# Allegro board parasdr_layout.brd
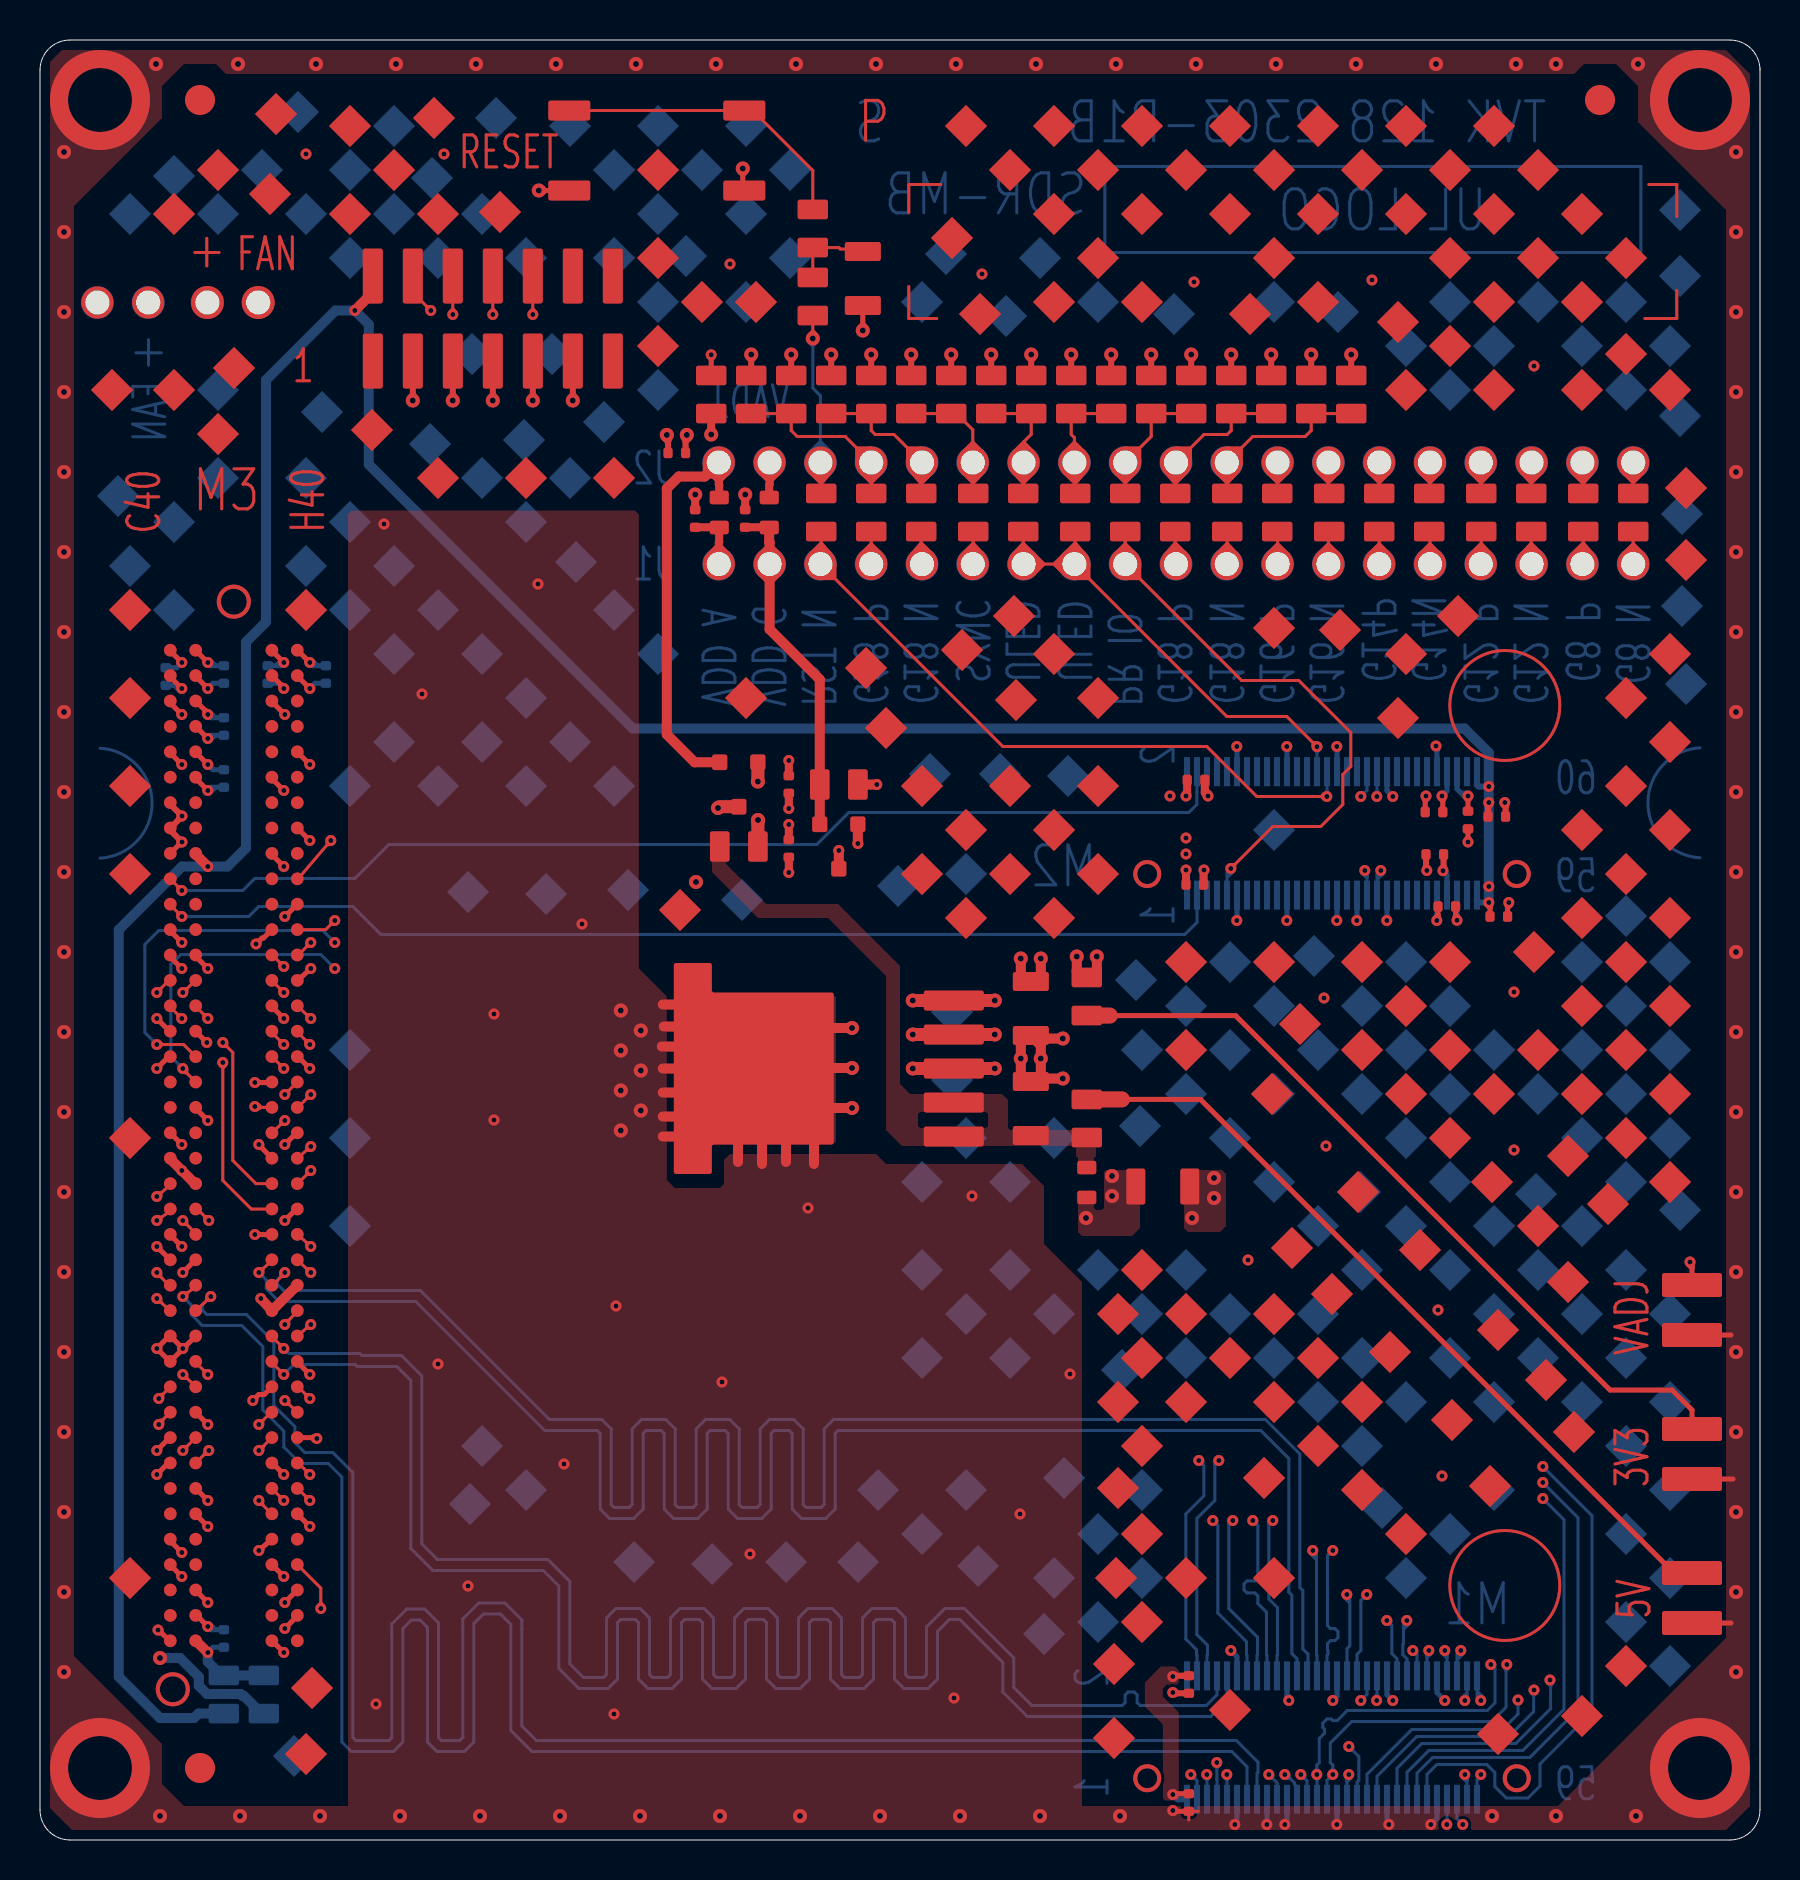
[diagram p0: board, top side]
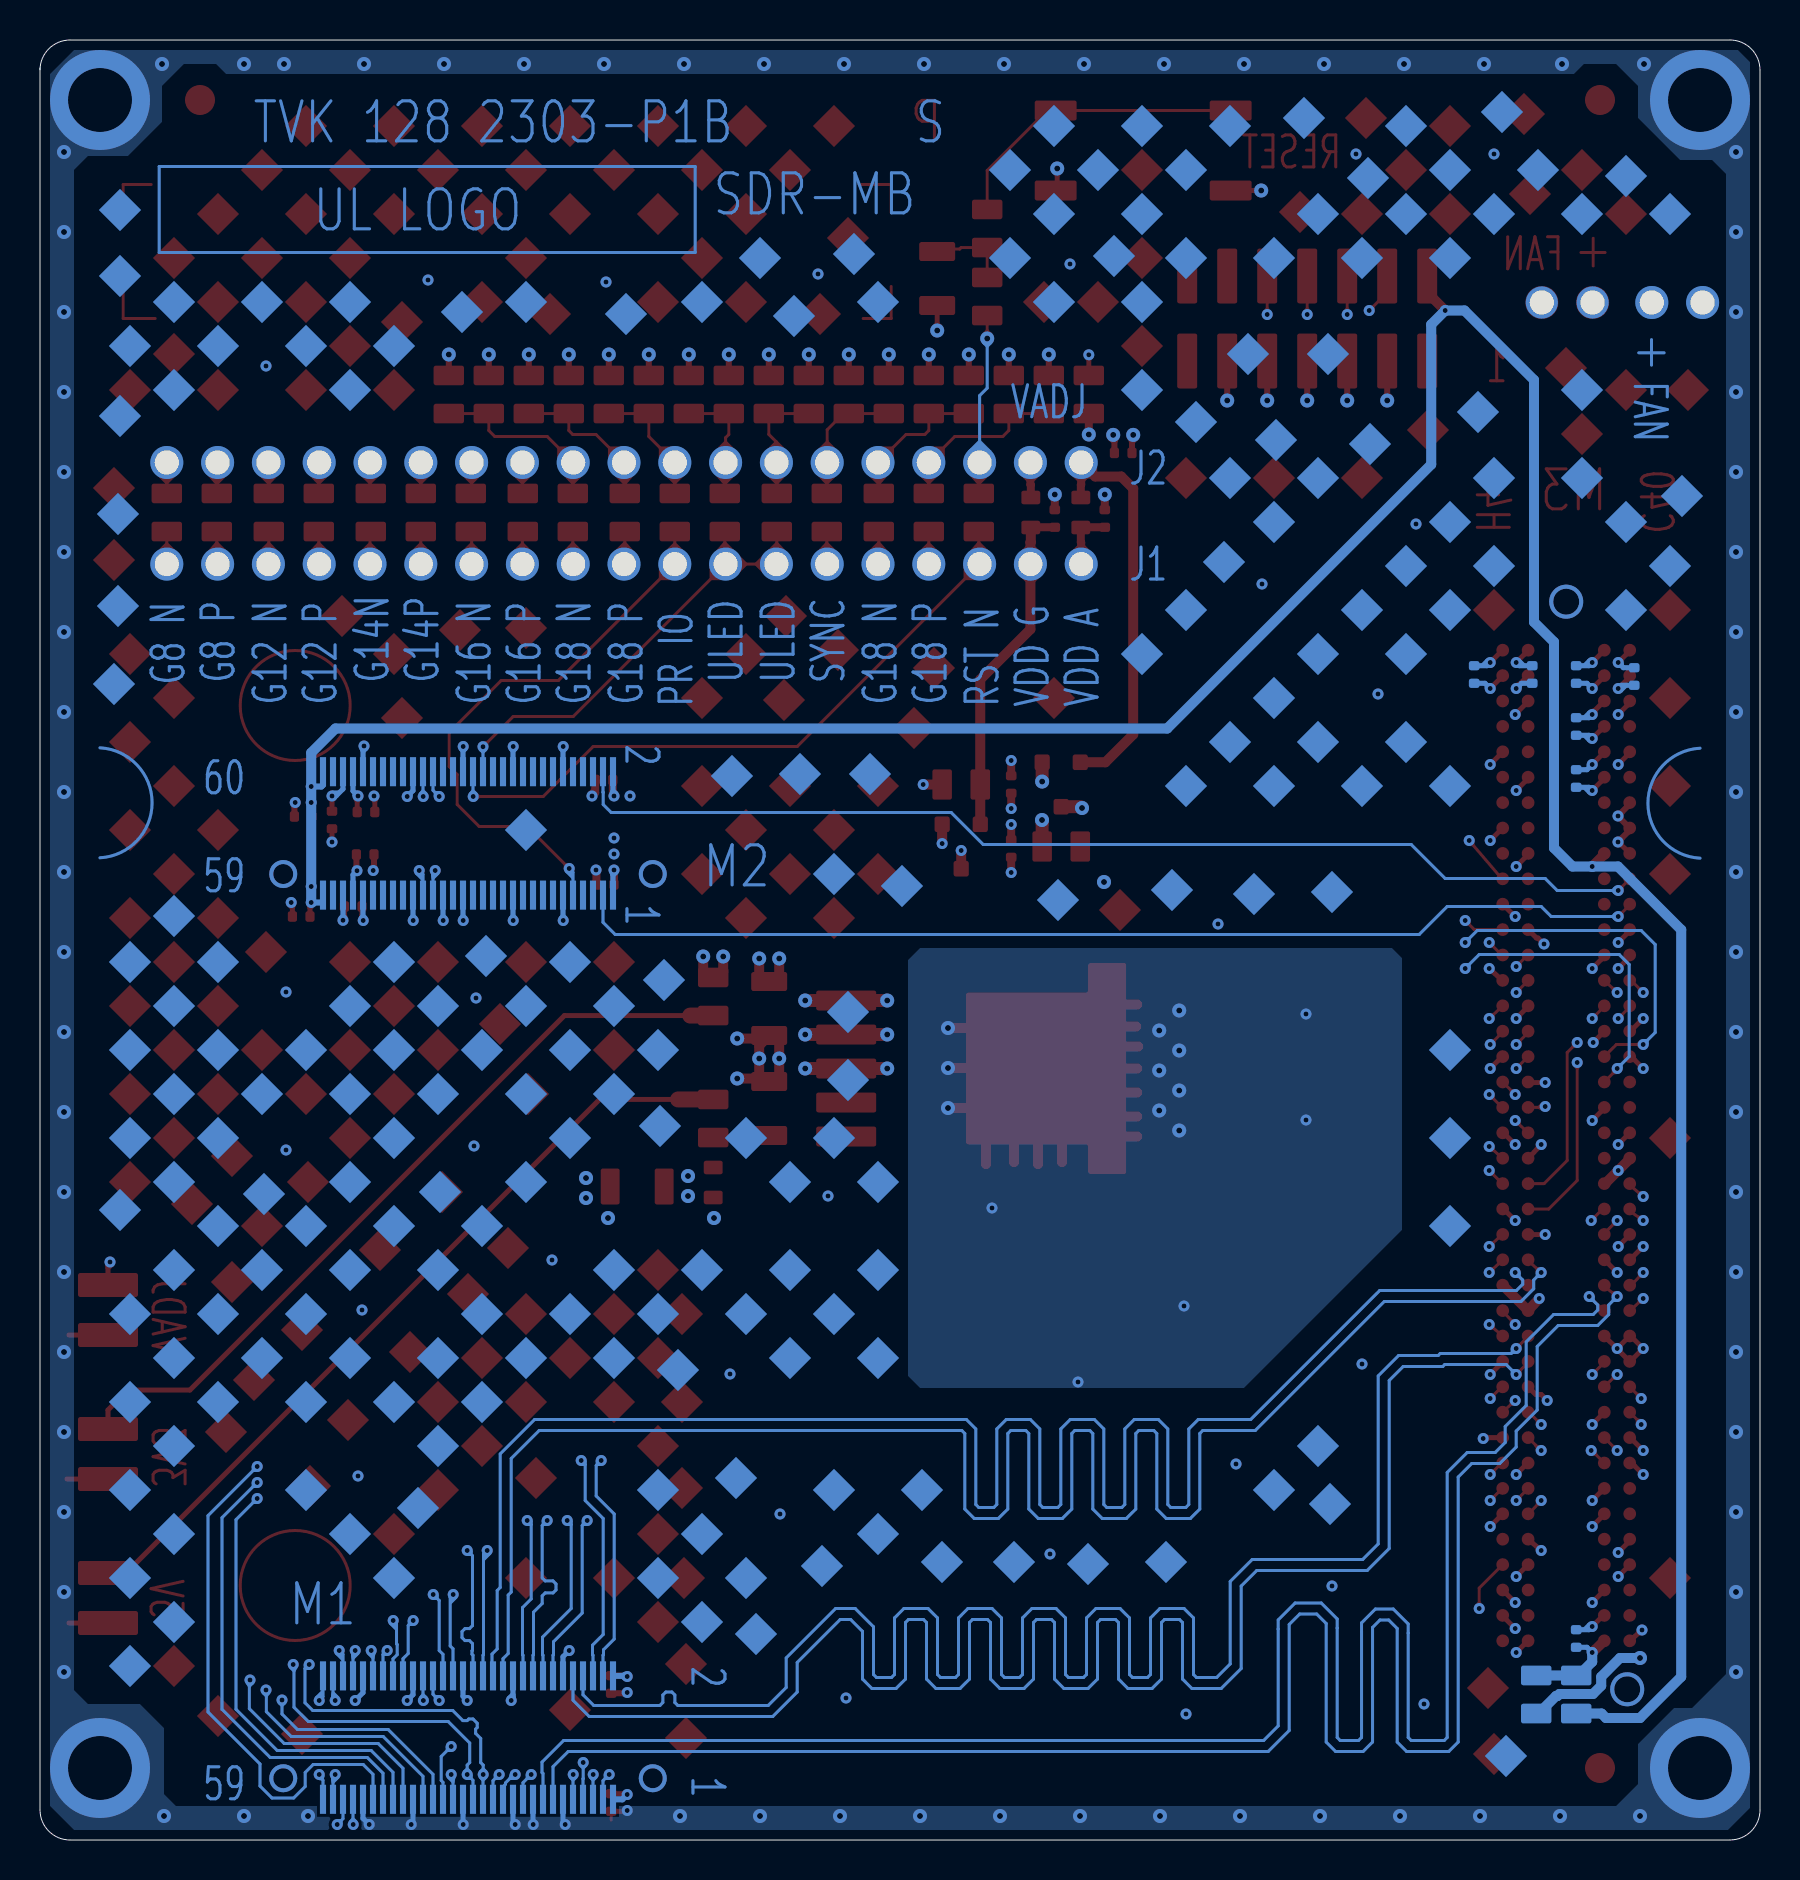
[diagram p1: board, bottom side, seen from below]

Outline 86 x 90 mm; copper layers: TOP, L2-GND, L3-X, L4-Y, L5-GND, BOTTOM. Coordinates in mm from the lower left corner of the outline.

## Design rules (mm)
constraint set DEFAULT: min track width 0.15, pair gap 0.15
net group RX_MG: nets RX_D0_N RX_D0_P RX_D1_N RX_D1_P RX_D2_N RX_D2_P RX_D3_N RX_D3_P RX_D4_N RX_D4_P RX_D5_N RX_D5_P RX_FRAME_N RX_FRAME_P

## Placement (name value [footprint] x y rotation side)
A1  -  [1057-TVJ828V]  8 3.6 0 top
C1  100n  [501-BYZ20902-48_TOP]  57.44 1.88 270 top
C2  10u  [546-BYZ20902-264_TOP]  56.14 32.67 0 top
C3  10u  [546-BYZ20902-264_TOP]  49.54 36.58 90 top
C4  100n  [501-BYZ20902-48_TOP]  57.44 7.78 270 top
C5  10u  [546-BYZ20902-264_TOP]  49.54 41.58 270 top
C6  100n  [501-BYZ20902-48_TOP]  69.74 49.27 180 top
C7  100n  [501-BYZ20902-48_TOP]  70.34 46.68 180 top
C8  100n  [501-BYZ20902-48_TOP]  57.74 47.77 0 top
C9  100n  [501-BYZ20902-48_TOP]  72.94 46.18 0 top
C10  100n  [501-BYZ20902-48_TOP]  72.84 51.18 0 top
C11  100n  [501-BYZ20902-48_TOP]  35.26 66.08 90 top
C12  100n  [501-BYZ20902-48_TOP]  71.4 51 270 top
C13  100n  [501-BYZ20902-48_TOP]  57.8 53 0 top
C14  100n  [501-BYZ20902-48_TOP]  32.76 66.08 90 top
C15  100n  [501-BYZ20902-48_TOP]  69.7 51.4 180 top
C16  100n  [501-BYZ20902-48_TOP]  31.84 69.35 180 top
C17  10u  [546-BYZ20902-264_TOP]  41.14 78.07 270 top
C18  100n  [501-BYZ20902-48_TOP]  14.29 58.27 270 bottom
C19  100n  [501-BYZ20902-48_TOP]  11.39 58.27 90 bottom
C20  100n  [501-BYZ20902-48_TOP]  9.19 53.08 270 bottom
C21  100n  [501-BYZ20902-48_TOP]  9.19 55.68 270 bottom
C22  100n  [501-BYZ20902-48_TOP]  9.19 58.27 270 bottom
C23  100n  [501-BYZ20902-48_TOP]  6.29 58.18 90 bottom
C24  100n  [501-BYZ20902-48_TOP]  9.19 10.07 90 bottom
C25  100n  [501-BYZ20902-48_TOP]  37.44 52.77 270 top
C26  100n  [501-BYZ20902-48_TOP]  37.44 49.58 270 top
E97  -  [501-BYZ21994-999]  8 3.6 0 top
E98  -  [501-BYZ21994-999]  8 87 0 top
E99  -  [501-BYZ21994-999]  78 87 0 top
ET1  -  [028-BYZ20801-1_TOP]  80.34 20.58 180 bottom
ET2  -  [026-BYZ20801-1_TOP]  43.64 76.27 0 top
F1  -  [501-BYZ20901-698_TOP#2]  4.14 76.88 180 bottom
F2  -  [501-BYZ20901-698_TOP]  9.64 76.88 0 top
J1_1  -  [001-BYZ21990-138_TOP]  79.66 63.8 180 bottom
J1_2  -  [001-BYZ21990-138_TOP]  77.12 63.8 180 bottom
J1_3  -  [001-BYZ21990-138_TOP]  74.58 63.8 180 bottom
J1_4  -  [001-BYZ21990-138_TOP]  72.04 63.8 180 bottom
J1_5  -  [001-BYZ21990-138_TOP]  69.5 63.8 180 bottom
J1_6  -  [001-BYZ21990-138_TOP]  66.96 63.8 180 bottom
J1_7  -  [001-BYZ21990-138_TOP]  64.42 63.8 180 bottom
J1_8  -  [001-BYZ21990-138_TOP]  61.88 63.8 180 bottom
J1_9  -  [001-BYZ21990-138_TOP]  59.34 63.8 180 bottom
J1_10  -  [001-BYZ21990-138_TOP]  56.8 63.8 180 bottom
J1_11  -  [001-BYZ21990-138_TOP]  54.26 63.8 180 bottom
J1_12  -  [001-BYZ21990-138_TOP]  51.72 63.8 180 bottom
J1_13  -  [001-BYZ21990-138_TOP]  49.18 63.8 180 bottom
J1_14  -  [001-BYZ21990-138_TOP]  46.64 63.8 180 bottom
J1_15  -  [001-BYZ21990-138_TOP]  44.1 63.8 180 bottom
J1_16  -  [001-BYZ21990-138_TOP]  41.56 63.8 180 bottom
J1_17  -  [001-BYZ21990-138_TOP]  39.02 63.8 180 bottom
J1_18  -  [001-BYZ21990-138_TOP]  36.48 63.8 180 bottom
J1_19  -  [001-BYZ21990-138_TOP]  33.94 63.8 180 bottom
J2_1  -  [001-BYZ21990-138_TOP]  79.66 68.88 180 bottom
J2_2  -  [001-BYZ21990-138_TOP]  77.12 68.88 180 bottom
J2_3  -  [001-BYZ21990-138_TOP]  74.58 68.88 180 bottom
J2_4  -  [001-BYZ21990-138_TOP]  72.04 68.88 180 bottom
J2_5  -  [001-BYZ21990-138_TOP]  69.5 68.88 180 bottom
J2_6  -  [001-BYZ21990-138_TOP]  66.96 68.88 180 bottom
J2_7  -  [001-BYZ21990-138_TOP]  64.42 68.88 180 bottom
J2_8  -  [001-BYZ21990-138_TOP]  61.88 68.88 180 bottom
J2_9  -  [001-BYZ21990-138_TOP]  59.34 68.88 180 bottom
J2_10  -  [001-BYZ21990-138_TOP]  56.8 68.88 180 bottom
J2_11  -  [001-BYZ21990-138_TOP]  54.26 68.88 180 bottom
J2_12  -  [001-BYZ21990-138_TOP]  51.72 68.88 180 bottom
J2_13  -  [001-BYZ21990-138_TOP]  49.18 68.88 180 bottom
J2_14  -  [001-BYZ21990-138_TOP]  46.64 68.88 180 bottom
J2_15  -  [001-BYZ21990-138_TOP]  44.1 68.88 180 bottom
J2_16  -  [001-BYZ21990-138_TOP]  41.56 68.88 180 bottom
J2_17  -  [001-BYZ21990-138_TOP]  39.02 68.88 180 bottom
J2_18  -  [001-BYZ21990-138_TOP]  36.48 68.88 180 bottom
J2_19  -  [001-BYZ21990-138_TOP]  33.94 68.88 180 bottom
L1  120  [510-BYZ20902-264_TOP]  52.34 32.88 90 top
L2  120  [510-BYZ20902-264_TOP]  36.46 66.38 90 top
L3  120  [510-BYZ20902-264_TOP]  33.96 66.38 90 top
M1  -  [503-BYZ11987-1]  57.35 2.03 0 bottom
M1_2  -  [503-BYZ11987-1]  57.35 8.21 0 bottom
M1_3  -  [503-BYZ11987-1]  57.85 2.03 0 bottom
M1_4  -  [503-BYZ11987-1]  57.85 8.21 0 bottom
M1_5  -  [503-BYZ11987-1]  58.35 2.03 0 bottom
M1_6  -  [503-BYZ11987-1]  58.35 8.21 0 bottom
M1_7  -  [503-BYZ11987-1]  58.85 2.03 0 bottom
M1_8  -  [503-BYZ11987-1]  58.85 8.21 0 bottom
M1_9  -  [503-BYZ11987-1]  59.35 2.03 0 bottom
M1_10  -  [503-BYZ11987-1]  59.35 8.21 0 bottom
M1_11  -  [503-BYZ11987-1]  59.85 2.03 0 bottom
M1_12  -  [503-BYZ11987-1]  59.85 8.21 0 bottom
M1_13  -  [503-BYZ11987-1]  60.35 2.03 0 bottom
M1_14  -  [503-BYZ11987-1]  60.35 8.21 0 bottom
M1_15  -  [503-BYZ11987-1]  60.85 2.03 0 bottom
M1_16  -  [503-BYZ11987-1]  60.85 8.21 0 bottom
M1_17  -  [503-BYZ11987-1]  61.35 2.03 0 bottom
M1_18  -  [503-BYZ11987-1]  61.35 8.21 0 bottom
M1_19  -  [503-BYZ11987-1]  61.85 2.03 0 bottom
M1_20  -  [503-BYZ11987-1]  61.85 8.21 0 bottom
M1_21  -  [503-BYZ11987-1]  62.35 2.03 0 bottom
M1_22  -  [503-BYZ11987-1]  62.35 8.21 0 bottom
M1_23  -  [503-BYZ11987-1]  62.85 2.03 0 bottom
M1_24  -  [503-BYZ11987-1]  62.85 8.21 0 bottom
M1_25  -  [503-BYZ11987-1]  63.35 2.03 0 bottom
M1_26  -  [503-BYZ11987-1]  63.35 8.21 0 bottom
M1_27  -  [503-BYZ11987-1]  63.85 2.03 0 bottom
M1_28  -  [503-BYZ11987-1]  63.85 8.21 0 bottom
M1_29  -  [503-BYZ11987-1]  64.35 2.03 0 bottom
M1_30  -  [503-BYZ11987-1]  64.35 8.21 0 bottom
M1_31  -  [503-BYZ11987-1]  64.85 2.03 0 bottom
M1_32  -  [503-BYZ11987-1]  64.85 8.21 0 bottom
M1_33  -  [503-BYZ11987-1]  65.35 2.03 0 bottom
M1_34  -  [503-BYZ11987-1]  65.35 8.21 0 bottom
M1_35  -  [503-BYZ11987-1]  65.85 2.03 0 bottom
M1_36  -  [503-BYZ11987-1]  65.85 8.21 0 bottom
M1_37  -  [503-BYZ11987-1]  66.35 2.03 0 bottom
M1_38  -  [503-BYZ11987-1]  66.35 8.21 0 bottom
M1_39  -  [503-BYZ11987-1]  66.85 2.03 0 bottom
M1_40  -  [503-BYZ11987-1]  66.85 8.21 0 bottom
M1_41  -  [503-BYZ11987-1]  67.35 2.03 0 bottom
M1_42  -  [503-BYZ11987-1]  67.35 8.21 0 bottom
M1_43  -  [503-BYZ11987-1]  67.85 2.03 0 bottom
M1_44  -  [503-BYZ11987-1]  67.85 8.21 0 bottom
M1_45  -  [503-BYZ11987-1]  68.35 2.03 0 bottom
M1_46  -  [503-BYZ11987-1]  68.35 8.21 0 bottom
M1_47  -  [503-BYZ11987-1]  68.85 2.03 0 bottom
M1_48  -  [503-BYZ11987-1]  68.85 8.21 0 bottom
M1_49  -  [503-BYZ11987-1]  69.35 2.03 0 bottom
M1_50  -  [503-BYZ11987-1]  69.35 8.21 0 bottom
M1_51  -  [503-BYZ11987-1]  69.85 2.03 0 bottom
M1_52  -  [503-BYZ11987-1]  69.85 8.21 0 bottom
M1_53  -  [503-BYZ11987-1]  70.35 2.03 0 bottom
M1_54  -  [503-BYZ11987-1]  70.35 8.21 0 bottom
M1_55  -  [503-BYZ11987-1]  70.85 2.03 0 bottom
M1_56  -  [503-BYZ11987-1]  70.85 8.21 0 bottom
M1_57  -  [503-BYZ11987-1]  71.35 2.03 0 bottom
M1_58  -  [503-BYZ11987-1]  71.35 8.21 0 bottom
M1_59  -  [503-BYZ11987-1]  71.85 2.03 0 bottom
M1_60  -  [503-BYZ11987-1]  71.85 8.21 0 bottom
M2  -  [503-BYZ11987-1]  57.35 47.24 0 bottom
M2_2  -  [503-BYZ11987-1]  57.35 53.42 0 bottom
M2_3  -  [503-BYZ11987-1]  57.85 47.24 0 bottom
M2_4  -  [503-BYZ11987-1]  57.85 53.42 0 bottom
M2_5  -  [503-BYZ11987-1]  58.35 47.24 0 bottom
M2_6  -  [503-BYZ11987-1]  58.35 53.42 0 bottom
M2_7  -  [503-BYZ11987-1]  58.85 47.24 0 bottom
M2_8  -  [503-BYZ11987-1]  58.85 53.42 0 bottom
M2_9  -  [503-BYZ11987-1]  59.35 47.24 0 bottom
M2_10  -  [503-BYZ11987-1]  59.35 53.42 0 bottom
M2_11  -  [503-BYZ11987-1]  59.85 47.24 0 bottom
M2_12  -  [503-BYZ11987-1]  59.85 53.42 0 bottom
M2_13  -  [503-BYZ11987-1]  60.35 47.24 0 bottom
M2_14  -  [503-BYZ11987-1]  60.35 53.42 0 bottom
M2_15  -  [503-BYZ11987-1]  60.85 47.24 0 bottom
M2_16  -  [503-BYZ11987-1]  60.85 53.42 0 bottom
M2_17  -  [503-BYZ11987-1]  61.35 47.24 0 bottom
M2_18  -  [503-BYZ11987-1]  61.35 53.42 0 bottom
M2_19  -  [503-BYZ11987-1]  61.85 47.24 0 bottom
M2_20  -  [503-BYZ11987-1]  61.85 53.42 0 bottom
M2_21  -  [503-BYZ11987-1]  62.35 47.24 0 bottom
M2_22  -  [503-BYZ11987-1]  62.35 53.42 0 bottom
M2_23  -  [503-BYZ11987-1]  62.85 47.24 0 bottom
M2_24  -  [503-BYZ11987-1]  62.85 53.42 0 bottom
M2_25  -  [503-BYZ11987-1]  63.35 47.24 0 bottom
M2_26  -  [503-BYZ11987-1]  63.35 53.42 0 bottom
M2_27  -  [503-BYZ11987-1]  63.85 47.24 0 bottom
M2_28  -  [503-BYZ11987-1]  63.85 53.42 0 bottom
M2_29  -  [503-BYZ11987-1]  64.35 47.24 0 bottom
M2_30  -  [503-BYZ11987-1]  64.35 53.42 0 bottom
M2_31  -  [503-BYZ11987-1]  64.85 47.24 0 bottom
M2_32  -  [503-BYZ11987-1]  64.85 53.42 0 bottom
M2_33  -  [503-BYZ11987-1]  65.35 47.24 0 bottom
M2_34  -  [503-BYZ11987-1]  65.35 53.42 0 bottom
M2_35  -  [503-BYZ11987-1]  65.85 47.24 0 bottom
M2_36  -  [503-BYZ11987-1]  65.85 53.42 0 bottom
M2_37  -  [503-BYZ11987-1]  66.35 47.24 0 bottom
M2_38  -  [503-BYZ11987-1]  66.35 53.42 0 bottom
M2_39  -  [503-BYZ11987-1]  66.85 47.24 0 bottom
M2_40  -  [503-BYZ11987-1]  66.85 53.42 0 bottom
M2_41  -  [503-BYZ11987-1]  67.35 47.24 0 bottom
M2_42  -  [503-BYZ11987-1]  67.35 53.42 0 bottom
M2_43  -  [503-BYZ11987-1]  67.85 47.24 0 bottom
M2_44  -  [503-BYZ11987-1]  67.85 53.42 0 bottom
M2_45  -  [503-BYZ11987-1]  68.35 47.24 0 bottom
M2_46  -  [503-BYZ11987-1]  68.35 53.42 0 bottom
M2_47  -  [503-BYZ11987-1]  68.85 47.24 0 bottom
M2_48  -  [503-BYZ11987-1]  68.85 53.42 0 bottom
M2_49  -  [503-BYZ11987-1]  69.35 47.24 0 bottom
M2_50  -  [503-BYZ11987-1]  69.35 53.42 0 bottom
M2_51  -  [503-BYZ11987-1]  69.85 47.24 0 bottom
M2_52  -  [503-BYZ11987-1]  69.85 53.42 0 bottom
M2_53  -  [503-BYZ11987-1]  70.35 47.24 0 bottom
M2_54  -  [503-BYZ11987-1]  70.35 53.42 0 bottom
M2_55  -  [503-BYZ11987-1]  70.85 47.24 0 bottom
M2_56  -  [503-BYZ11987-1]  70.85 53.42 0 bottom
M2_57  -  [503-BYZ11987-1]  71.35 47.24 0 bottom
M2_58  -  [503-BYZ11987-1]  71.35 53.42 0 bottom
M2_59  -  [503-BYZ11987-1]  71.85 47.24 0 bottom
M2_60  -  [503-BYZ11987-1]  71.85 53.42 0 bottom
M3  -  [001-BYZ21990-134_TOP]  12.87 9.96 270 top
M3_C1  -  [001-BYZ21990-134_TOP]  6.51 9.96 270 top
M3_C2  -  [001-BYZ21990-134_TOP]  6.51 11.23 270 top
M3_C3  -  [001-BYZ21990-134_TOP]  6.51 12.5 270 top
M3_C4  -  [001-BYZ21990-134_TOP]  6.51 13.77 270 top
M3_C5  -  [001-BYZ21990-134_TOP]  6.51 15.04 270 top
M3_C6  -  [001-BYZ21990-134_TOP]  6.51 16.31 270 top
M3_C7  -  [001-BYZ21990-134_TOP]  6.51 17.58 270 top
M3_C8  -  [001-BYZ21990-134_TOP]  6.51 18.85 270 top
M3_C9  -  [001-BYZ21990-134_TOP]  6.51 20.12 270 top
M3_C10  -  [001-BYZ21990-134_TOP]  6.51 21.39 270 top
M3_C11  -  [001-BYZ21990-134_TOP]  6.51 22.66 270 top
M3_C12  -  [001-BYZ21990-134_TOP]  6.51 23.93 270 top
M3_C13  -  [001-BYZ21990-134_TOP]  6.51 25.2 270 top
M3_C14  -  [001-BYZ21990-134_TOP]  6.51 26.47 270 top
M3_C15  -  [001-BYZ21990-134_TOP]  6.51 27.74 270 top
M3_C16  -  [001-BYZ21990-134_TOP]  6.51 29.01 270 top
M3_C17  -  [001-BYZ21990-134_TOP]  6.51 30.28 270 top
M3_C18  -  [001-BYZ21990-134_TOP]  6.51 31.55 270 top
M3_C19  -  [001-BYZ21990-134_TOP]  6.51 32.82 270 top
M3_C20  -  [001-BYZ21990-134_TOP]  6.51 34.09 270 top
M3_C21  -  [001-BYZ21990-134_TOP]  6.51 35.36 270 top
M3_C22  -  [001-BYZ21990-134_TOP]  6.51 36.63 270 top
M3_C23  -  [001-BYZ21990-134_TOP]  6.51 37.9 270 top
M3_C24  -  [001-BYZ21990-134_TOP]  6.51 39.17 270 top
M3_C25  -  [001-BYZ21990-134_TOP]  6.51 40.44 270 top
M3_C26  -  [001-BYZ21990-134_TOP]  6.51 41.71 270 top
M3_C27  -  [001-BYZ21990-134_TOP]  6.51 42.98 270 top
M3_C28  -  [001-BYZ21990-134_TOP]  6.51 44.25 270 top
M3_C29  -  [001-BYZ21990-134_TOP]  6.51 45.52 270 top
M3_C30  -  [001-BYZ21990-134_TOP]  6.51 46.79 270 top
M3_C31  -  [001-BYZ21990-134_TOP]  6.51 48.06 270 top
M3_C32  -  [001-BYZ21990-134_TOP]  6.51 49.33 270 top
M3_C33  -  [001-BYZ21990-134_TOP]  6.51 50.6 270 top
M3_C34  -  [001-BYZ21990-134_TOP]  6.51 51.87 270 top
M3_C35  -  [001-BYZ21990-134_TOP]  6.51 53.14 270 top
M3_C36  -  [001-BYZ21990-134_TOP]  6.51 54.41 270 top
M3_C37  -  [001-BYZ21990-134_TOP]  6.51 55.68 270 top
M3_C38  -  [001-BYZ21990-134_TOP]  6.51 56.95 270 top
M3_C39  -  [001-BYZ21990-134_TOP]  6.51 58.22 270 top
M3_C40  -  [001-BYZ21990-134_TOP]  6.51 59.49 270 top
M3_D1  -  [001-BYZ21990-134_TOP]  7.79 9.96 270 top
M3_D2  -  [001-BYZ21990-134_TOP]  7.79 11.23 270 top
M3_D3  -  [001-BYZ21990-134_TOP]  7.79 12.5 270 top
M3_D4  -  [001-BYZ21990-134_TOP]  7.79 13.77 270 top
M3_D5  -  [001-BYZ21990-134_TOP]  7.79 15.04 270 top
M3_D6  -  [001-BYZ21990-134_TOP]  7.79 16.31 270 top
M3_D7  -  [001-BYZ21990-134_TOP]  7.79 17.58 270 top
M3_D8  -  [001-BYZ21990-134_TOP]  7.79 18.85 270 top
M3_D9  -  [001-BYZ21990-134_TOP]  7.79 20.12 270 top
M3_D10  -  [001-BYZ21990-134_TOP]  7.79 21.39 270 top
M3_D11  -  [001-BYZ21990-134_TOP]  7.79 22.66 270 top
M3_D12  -  [001-BYZ21990-134_TOP]  7.79 23.93 270 top
M3_D13  -  [001-BYZ21990-134_TOP]  7.79 25.2 270 top
M3_D14  -  [001-BYZ21990-134_TOP]  7.79 26.47 270 top
M3_D15  -  [001-BYZ21990-134_TOP]  7.79 27.74 270 top
M3_D16  -  [001-BYZ21990-134_TOP]  7.79 29.01 270 top
M3_D17  -  [001-BYZ21990-134_TOP]  7.79 30.28 270 top
M3_D18  -  [001-BYZ21990-134_TOP]  7.79 31.55 270 top
M3_D19  -  [001-BYZ21990-134_TOP]  7.79 32.82 270 top
M3_D20  -  [001-BYZ21990-134_TOP]  7.79 34.09 270 top
M3_D21  -  [001-BYZ21990-134_TOP]  7.79 35.36 270 top
M3_D22  -  [001-BYZ21990-134_TOP]  7.79 36.63 270 top
M3_D23  -  [001-BYZ21990-134_TOP]  7.79 37.9 270 top
M3_D24  -  [001-BYZ21990-134_TOP]  7.79 39.17 270 top
M3_D25  -  [001-BYZ21990-134_TOP]  7.79 40.44 270 top
M3_D26  -  [001-BYZ21990-134_TOP]  7.79 41.71 270 top
M3_D27  -  [001-BYZ21990-134_TOP]  7.79 42.98 270 top
M3_D28  -  [001-BYZ21990-134_TOP]  7.79 44.25 270 top
M3_D29  -  [001-BYZ21990-134_TOP]  7.79 45.52 270 top
M3_D30  -  [001-BYZ21990-134_TOP]  7.79 46.79 270 top
M3_D31  -  [001-BYZ21990-134_TOP]  7.79 48.06 270 top
M3_D32  -  [001-BYZ21990-134_TOP]  7.79 49.33 270 top
M3_D33  -  [001-BYZ21990-134_TOP]  7.79 50.6 270 top
M3_D34  -  [001-BYZ21990-134_TOP]  7.79 51.87 270 top
M3_D35  -  [001-BYZ21990-134_TOP]  7.79 53.14 270 top
M3_D36  -  [001-BYZ21990-134_TOP]  7.79 54.41 270 top
M3_D37  -  [001-BYZ21990-134_TOP]  7.79 55.68 270 top
M3_D38  -  [001-BYZ21990-134_TOP]  7.79 56.95 270 top
M3_D39  -  [001-BYZ21990-134_TOP]  7.79 58.22 270 top
M3_D40  -  [001-BYZ21990-134_TOP]  7.79 59.49 270 top
M3_G1  -  [001-BYZ21990-134_TOP]  11.6 9.96 270 top
M3_G2  -  [001-BYZ21990-134_TOP]  11.6 11.23 270 top
M3_G3  -  [001-BYZ21990-134_TOP]  11.6 12.5 270 top
M3_G4  -  [001-BYZ21990-134_TOP]  11.6 13.77 270 top
M3_G5  -  [001-BYZ21990-134_TOP]  11.6 15.04 270 top
M3_G6  -  [001-BYZ21990-134_TOP]  11.6 16.31 270 top
M3_G7  -  [001-BYZ21990-134_TOP]  11.6 17.58 270 top
M3_G8  -  [001-BYZ21990-134_TOP]  11.6 18.85 270 top
M3_G9  -  [001-BYZ21990-134_TOP]  11.6 20.12 270 top
M3_G10  -  [001-BYZ21990-134_TOP]  11.6 21.39 270 top
M3_G11  -  [001-BYZ21990-134_TOP]  11.6 22.66 270 top
M3_G12  -  [001-BYZ21990-134_TOP]  11.6 23.93 270 top
M3_G13  -  [001-BYZ21990-134_TOP]  11.6 25.2 270 top
M3_G14  -  [001-BYZ21990-134_TOP]  11.6 26.47 270 top
M3_G15  -  [001-BYZ21990-134_TOP]  11.6 27.74 270 top
M3_G16  -  [001-BYZ21990-134_TOP]  11.6 29.01 270 top
M3_G17  -  [001-BYZ21990-134_TOP]  11.6 30.28 270 top
M3_G18  -  [001-BYZ21990-134_TOP]  11.6 31.55 270 top
M3_G19  -  [001-BYZ21990-134_TOP]  11.6 32.82 270 top
M3_G20  -  [001-BYZ21990-134_TOP]  11.6 34.09 270 top
M3_G21  -  [001-BYZ21990-134_TOP]  11.6 35.36 270 top
M3_G22  -  [001-BYZ21990-134_TOP]  11.6 36.63 270 top
M3_G23  -  [001-BYZ21990-134_TOP]  11.6 37.9 270 top
M3_G24  -  [001-BYZ21990-134_TOP]  11.6 39.17 270 top
M3_G25  -  [001-BYZ21990-134_TOP]  11.6 40.44 270 top
M3_G26  -  [001-BYZ21990-134_TOP]  11.6 41.71 270 top
M3_G27  -  [001-BYZ21990-134_TOP]  11.6 42.98 270 top
M3_G28  -  [001-BYZ21990-134_TOP]  11.6 44.25 270 top
M3_G29  -  [001-BYZ21990-134_TOP]  11.6 45.52 270 top
M3_G30  -  [001-BYZ21990-134_TOP]  11.6 46.79 270 top
M3_G31  -  [001-BYZ21990-134_TOP]  11.6 48.06 270 top
M3_G32  -  [001-BYZ21990-134_TOP]  11.6 49.33 270 top
M3_G33  -  [001-BYZ21990-134_TOP]  11.6 50.6 270 top
M3_G34  -  [001-BYZ21990-134_TOP]  11.6 51.87 270 top
M3_G35  -  [001-BYZ21990-134_TOP]  11.6 53.14 270 top
M3_G36  -  [001-BYZ21990-134_TOP]  11.6 54.41 270 top
M3_G37  -  [001-BYZ21990-134_TOP]  11.6 55.68 270 top
M3_G38  -  [001-BYZ21990-134_TOP]  11.6 56.95 270 top
M3_G39  -  [001-BYZ21990-134_TOP]  11.6 58.22 270 top
M3_G40  -  [001-BYZ21990-134_TOP]  11.6 59.49 270 top
M3_H2  -  [001-BYZ21990-134_TOP]  12.87 11.23 270 top
M3_H3  -  [001-BYZ21990-134_TOP]  12.87 12.5 270 top
M3_H4  -  [001-BYZ21990-134_TOP]  12.87 13.77 270 top
M3_H5  -  [001-BYZ21990-134_TOP]  12.87 15.04 270 top
M3_H6  -  [001-BYZ21990-134_TOP]  12.87 16.31 270 top
M3_H7  -  [001-BYZ21990-134_TOP]  12.87 17.58 270 top
M3_H8  -  [001-BYZ21990-134_TOP]  12.87 18.85 270 top
M3_H9  -  [001-BYZ21990-134_TOP]  12.87 20.12 270 top
M3_H10  -  [001-BYZ21990-134_TOP]  12.87 21.39 270 top
M3_H11  -  [001-BYZ21990-134_TOP]  12.87 22.66 270 top
M3_H12  -  [001-BYZ21990-134_TOP]  12.87 23.93 270 top
M3_H13  -  [001-BYZ21990-134_TOP]  12.87 25.2 270 top
M3_H14  -  [001-BYZ21990-134_TOP]  12.87 26.47 270 top
M3_H15  -  [001-BYZ21990-134_TOP]  12.87 27.74 270 top
M3_H16  -  [001-BYZ21990-134_TOP]  12.87 29.01 270 top
M3_H17  -  [001-BYZ21990-134_TOP]  12.87 30.28 270 top
M3_H18  -  [001-BYZ21990-134_TOP]  12.87 31.55 270 top
M3_H19  -  [001-BYZ21990-134_TOP]  12.87 32.82 270 top
M3_H20  -  [001-BYZ21990-134_TOP]  12.87 34.09 270 top
M3_H21  -  [001-BYZ21990-134_TOP]  12.87 35.36 270 top
M3_H22  -  [001-BYZ21990-134_TOP]  12.87 36.63 270 top
M3_H23  -  [001-BYZ21990-134_TOP]  12.87 37.9 270 top
M3_H24  -  [001-BYZ21990-134_TOP]  12.87 39.17 270 top
M3_H25  -  [001-BYZ21990-134_TOP]  12.87 40.44 270 top
M3_H26  -  [001-BYZ21990-134_TOP]  12.87 41.71 270 top
M3_H27  -  [001-BYZ21990-134_TOP]  12.87 42.98 270 top
M3_H28  -  [001-BYZ21990-134_TOP]  12.87 44.25 270 top
M3_H29  -  [001-BYZ21990-134_TOP]  12.87 45.52 270 top
M3_H30  -  [001-BYZ21990-134_TOP]  12.87 46.79 270 top
M3_H31  -  [001-BYZ21990-134_TOP]  12.87 48.06 270 top
M3_H32  -  [001-BYZ21990-134_TOP]  12.87 49.33 270 top
M3_H33  -  [001-BYZ21990-134_TOP]  12.87 50.6 270 top
M3_H34  -  [001-BYZ21990-134_TOP]  12.87 51.87 270 top
M3_H35  -  [001-BYZ21990-134_TOP]  12.87 53.14 270 top
M3_H36  -  [001-BYZ21990-134_TOP]  12.87 54.41 270 top
M3_H37  -  [001-BYZ21990-134_TOP]  12.87 55.68 270 top
M3_H38  -  [001-BYZ21990-134_TOP]  12.87 56.95 270 top
M3_H39  -  [001-BYZ21990-134_TOP]  12.87 58.22 270 top
M3_H40  -  [001-BYZ21990-134_TOP]  12.87 59.49 270 top
N1  -  [501-BYZ10905-40]  39.44 38.58 180 top
NOREF  -  []  -0.14 55.23 0 top
NOREF#2  -  []  65.23 5.12 90 top
NOREF#3  -  []  65.23 50.33 90 top
NOREF#4  -  []  -0.14 0.23 90 top
R1  680  [515-BYZ10902-70]  52.34 36.08 90 top
R2  680  [515-BYZ10902-70]  52.34 42.18 270 top
R3  680  [515-BYZ10902-70]  33.56 72.27 90 top
R4  10k  [515-BYZ10902-70]  63.56 72.27 270 top
R5  10k  [515-BYZ10902-70]  61.56 72.27 270 top
R6  10k  [515-BYZ10902-70]  57.56 72.27 270 top
R7  10k  [515-BYZ10902-70]  51.56 72.27 270 top
R8  10k  [515-BYZ10902-70]  49.56 72.27 270 top
R9  10k  [515-BYZ10902-70]  43.56 72.27 270 top
R10  10k  [515-BYZ10902-70]  41.56 72.27 270 top
R11  10k  [515-BYZ10902-70]  35.56 72.27 270 top
R12  680  [515-BYZ10902-70]  38.64 77.17 90 top
R13  10k  [515-BYZ10902-70]  65.56 72.27 90 top
R14  10k  [515-BYZ10902-70]  59.56 72.27 90 top
R15  10k  [515-BYZ10902-70]  55.56 72.27 90 top
R16  10k  [515-BYZ10902-70]  53.56 72.27 90 top
R17  10k  [515-BYZ10902-70]  47.56 72.27 90 top
R18  10k  [515-BYZ10902-70]  45.56 72.27 90 top
R19  10k  [515-BYZ10902-70]  39.56 72.27 90 top
R20  10k  [515-BYZ10902-70]  37.56 72.27 90 top
R21  680  [515-BYZ10902-70]  38.64 80.57 90 top
R22  10k  [515-BYZ10902-70]  11.19 7.28 90 bottom
R23  33  [515-BYZ10902-70]  79.66 66.38 90 top
R24  33  [515-BYZ10902-70]  77.16 66.38 90 top
R25  33  [515-BYZ10902-70]  74.56 66.38 90 top
R26  33  [515-BYZ10902-70]  72.06 66.38 90 top
R27  33  [515-BYZ10902-70]  69.46 66.38 90 top
R28  33  [515-BYZ10902-70]  66.96 66.38 90 top
R29  33  [515-BYZ10902-70]  64.46 66.38 90 top
R30  33  [515-BYZ10902-70]  61.86 66.38 90 top
R31  33  [515-BYZ10902-70]  59.36 66.38 90 top
R32  33  [515-BYZ10902-70]  56.76 66.38 90 top
R33  33  [515-BYZ10902-70]  54.26 66.38 90 top
R34  33  [515-BYZ10902-70]  51.76 66.38 90 top
R35  33  [515-BYZ10902-70]  49.16 66.38 90 top
R36  33  [515-BYZ10902-70]  46.66 66.38 90 top
R37  33  [515-BYZ10902-70]  44.06 66.38 90 top
R38  33  [515-BYZ10902-70]  41.56 66.38 90 top
R39  33  [515-BYZ10902-70]  39.06 66.38 90 top
R40  10k  [515-BYZ10902-70]  9.19 7.28 90 bottom
R41  680  [515-BYZ10902-70]  34.94 49.68 0 top
R42  680  [515-BYZ10902-70]  39.94 52.77 0 top
S1  -  [502-BYZ20904-100_TOP]  30.84 84.47 180 top
V1  -  [501-BYZ10902-387]  83 12.1 0 top
V2  -  [501-BYZ10902-387]  83 19.3 0 top
V3  -  [501-BYZ10902-387]  83 26.5 0 top
V4  -  [502-BYZ20903-46_TOP]  39.94 49.68 90 top
V5  -  [502-BYZ20903-46_TOP]  34.94 52.77 90 top
X3  -  [501-BYZ10901-392]  22.64 76.07 0 top

## Library data of the parts
A1 = BOARD: part number: BOARD-BOARD
C1 C4 C6-C16 C18-C26 = RJC464302: alternate symbols: (T:501-BYZ20902-48_TOP,501-BYZ10902-503;B:501-BYZ20902-48_BOT,501-BYZ10902-503); part number: RJC464302-100N
C2 C3 C5 C17 = RJC464316: alternate symbols: (T:546-BYZ20902-264_TOP;B:546-BYZ20902-264_BOT); part number: RJC464316-10U
E97 = FIDUCIAL: alternate symbols: (501-BYZ21994-999); part number: FIDUCIAL-FIDUCIAL_P,FIDUCIAL
E98 E99 = FIDUCIAL: alternate symbols: (501-BYZ21994-999); part number: FIDUCIAL-FIDUCIAL1,FIDUCIAL
ET1 = LABEL: alternate symbols: (T:028-BYZ20801-1_TOP;B:028-BYZ20801-1_BOT); part number: LABEL-LZF083204/3,LABEL
ET2 = LABEL: alternate symbols: (T:026-BYZ20801-1_TOP,001-BYZ20801-19_TOP;B:026-BYZ20801-1_BOT,001-BYZ20801-19_BOT); part number: LABEL-LZF083256/1,LABEL
F1 F2 = RPV38015/0102: alternate symbols: (T:501-BYZ20901-698_TOP;B:501-BYZ20901-698_BOT); part number: RPV38015/0102-RPV38015/0102
J1_1-J1_19 J2_1-J2_19 = TESTPOINTHOLE1/064: alternate symbols: (T:001-BYZ21990-138_TOP;B:001-BYZ21990-138_BOT); part number: TESTPOINTHOLE1/064-TESTPOINTHOLE1/064
L1-L3 = REG70605: alternate symbols: (T:510-BYZ20902-264_TOP;B:510-BYZ20902-264_BOT); part number: REG70605-REG70605/31,120; signal model: DEFAULT_INDUCTOR_120nH_1_2
M1 M1_2-M1_60 M2 M2_2-M2_60 = TP_DIA040_SMD: alternate symbols: (503-BYZ11987-1); part number: TP_DIA040_SMD-TP_DIA040_SMD
M3 M3_C1-M3_C40 M3_D1-M3_D40 M3_G1-M3_G40 M3_H2-M3_H40 = TESTPOINT640MY: alternate symbols: (T:001-BYZ21990-134_TOP,002-BYZ21990-134_TOP;B:001-BYZ21990-134_BOT,002-BYZ21990-134_BOT); part number: TESTPOINT640MY-TESTPOINT640MY
N1 = RYT9990100/25: alternate symbols: (501-BYZ10905-40); part number: RYT9990100/25-RYT9990100/25,LT1764AEQ_2.5
R1-R3 R12 R21 R41 R42 = REP62465: alternate symbols: (T:515-BYZ10902-70,515-BYZ20902-70_TOP;B:515-BYZ10902-70,515-BYZ20902-70_BOT); part number: REP62465-680
R4-R11 R13-R20 R22 R40 = REP62465: alternate symbols: (T:515-BYZ10902-70,515-BYZ20902-70_TOP;B:515-BYZ10902-70,515-BYZ20902-70_BOT); part number: REP62465-10K
R23-R39 = REP62465: alternate symbols: (T:515-BYZ10902-70,515-BYZ20902-70_TOP;B:515-BYZ10902-70,515-BYZ20902-70_BOT); part number: REP62465-33
S1 = RMD955007/01R2: alternate symbols: (T:502-BYZ20904-100_TOP,501-BYZ20904-24_TOP;B:502-BYZ20904-100_BOT,501-BYZ20904-24_BOT); part number: RMD955007/01R2-RMD955007/01
V1-V3 = RKZ43354: alternate symbols: (T:501-BYZ10902-387,501-BYZ20902-119_TOP,501-BYZ10902-83,501-BYZ20902-83_TOP;B:501-BYZ10902-387,501-BYZ20902-119_BOT,501-BYZ10902-83,501-BYZ20902-83_BOT); part number: RKZ43354-RKZ43354/1
V4 V5 = RYN1211621/1: alternate symbols: (T:502-BYZ20903-46_TOP;B:502-BYZ20903-46_BOT); part number: RYN1211621/1-RYN1211621/1,MMBT4401
X3 = RPV39103/814: alternate symbols: (501-BYZ10901-392); part number: RPV39103/814-RPV39103/814

## Footprints (pads in the part's own frame, mm; a bottom-side part is the same pattern mirrored in y, then rotated)
001-BYZ21990-134_TOP
  round 0.635 smd: 1(0,0)
001-BYZ21990-138_TOP
  round 1.602 hole 1.2: 1(0,0)
501-BYZ10901-392
  round 0 hole 1 unplated: (-5,0) (5,0)
  custom 1x2.75 smd: 1(-6,-2.125) 2(-6,2.125) 3(-4,-2.125) 4(-4,2.125) 5(-2,-2.125) 6(-2,2.125) 7(0,-2.125) 8(0,2.125) 9(2,-2.125) 10(2,2.125) 11(4,-2.125) 12(4,2.125) 13(6,-2.125) 14(6,2.125)
501-BYZ10902-387
  custom 3x1.2 smd: 1(-0.4,-1.25) 2(-0.4,1.25)
501-BYZ10905-40
  custom 3x1 smd: 1(-6.25,3.4) 2(-6.25,1.7) 3(-6.25,0) 4(-6.25,-1.7) 5(-6.25,-3.4)
  custom 8x10.55 smd: 6(3.75,0)
501-BYZ20901-698_TOP
  round 1.652 hole 1.2: 1(-1.27,0) 2(1.27,0)
501-BYZ20901-698_TOP#2
  round 1.602 hole 1.2: 1(-1.27,0) 2(1.27,0)
501-BYZ20902-48_TOP
  custom 0.46x0.53 smd: 1(-0.44,0) 2(0.44,0)
501-BYZ21994-999
  round 1.499 smd: (0,0)
502-BYZ20903-46_TOP
  custom 0.78x0.76 smd: 1(1.111,-0.953) 2(1.111,0.953) 3(-1.111,0)
502-BYZ20904-100_TOP
  custom 2.1x1 smd: 1(-4.375,2) 2(-4.375,-2) 3(4.375,2) 4(4.375,-2)
503-BYZ11987-1
  rect 0.305x1.448 smd: 1(0,0)
510-BYZ20902-264_TOP
  custom 0.68x0.95 smd: 1(-0.75,0) 2(0.75,0)
515-BYZ10902-70
  custom 0.98x1.52 smd: 1(-0.953,0) 2(0.953,0)
546-BYZ20902-264_TOP
  custom 0.95x1.8 smd: 1(-1.35,0) 2(1.35,0)

## Nets
3.3V_AUX: C9.1(A) C10.1(A) M2_59.1(P) M2_60.1(P) M3_D32.1(P) R40.1(A) X3.2(PA2)
3.3V_LED: R2.2(Y) V2.2(A)
5V: C3.1(A) L1.2(B) N1.1(SHDN*) N1.2(IN) R1.1(A) R41.1(A)
5V_LED: R1.2(Y) V1.2(A)
P5V: C2.1(A) C8.1(A) C13.1(A) F1.1(PA1) F2.1(PA1) L1.1(A) M2.1(P) M2_2.1(P)
PGND: C1.2(Y) C2.2(Y) C3.2(Y) C4.2(Y) C5.2(Y) C6.2(Y) C7.2(Y) C8.2(Y) C9.2(Y) C10.2(Y) C11.2(Y) C12.2(Y) C13.2(Y) C14.2(Y) C15.2(Y) C16.2(Y) C17.2(Y) C18.2(Y) C19.2(Y) C20.2(Y) C21.2(Y) C22.2(Y) C23.2(Y) C24.2(Y) C25.2(Y) C26.2(Y) F1.2(PA2) F2.2(PA2) M1_11.1(P) M1_12.1(P) M1_17.1(P) M1_21.1(P) M1_22.1(P) M1_31.1(P) M1_32.1(P) M1_41.1(P) M1_42.1(P) M1_51.1(P) M1_52.1(P) M2_11.1(P) M2_12.1(P) M2_21.1(P) M2_22.1(P) M2_31.1(P) M2_32.1(P) M2_35.1(P) M2_41.1(P) M2_42.1(P) M2_51.1(P) M2_52.1(P) M3_C1.1(P) M3_C4.1(P) M3_C5.1(P) M3_C8.1(P) M3_C9.1(P) M3_C12.1(P) M3_C13.1(P) M3_C16.1(P) M3_C17.1(P) M3_C20.1(P) M3_C21.1(P) M3_C24.1(P) M3_C25.1(P) M3_C28.1(P) M3_C29.1(P) M3_C32.1(P) M3_C33.1(P) M3_C34.1(P) M3_C36.1(P) M3_C38.1(P) M3_C40.1(P) M3_D2.1(P) M3_D3.1(P) M3_D6.1(P) M3_D7.1(P) M3_D10.1(P) M3_D13.1(P) M3_D16.1(P) M3_D19.1(P) M3_D22.1(P) M3_D25.1(P) M3_D28.1(P) M3_D35.1(P) M3_D37.1(P) M3_D39.1(P) M3_G1.1(P) M3_G4.1(P) M3_G5.1(P) M3_G8.1(P) M3_G11.1(P) M3_G14.1(P) M3_G17.1(P) M3_G20.1(P) M3_G23.1(P) M3_G26.1(P) M3_G29.1(P) M3_G32.1(P) M3_G35.1(P) M3_G38.1(P) M3_G40.1(P) M3_H2.1(P) M3_H3.1(P) M3_H6.1(P) M3_H9.1(P) M3_H12.1(P) M3_H15.1(P) M3_H18.1(P) M3_H21.1(P) M3_H24.1(P) M3_H27.1(P) M3_H30.1(P) M3_H33.1(P) M3_H36.1(P) M3_H39.1(P) N1.3(0V1) N1.6(0V0) R4.1(A) R5.1(A) R6.1(A) R7.1(A) R8.1(A) R9.1(A) R10.1(A) R11.1(A) R42.2(Y) S1.1(ARMA) S1.3(ARMB) V1.1(C) V2.1(C) V3.1(C) X3.3(PA3) X3.5(PA5) X3.7(PA7) X3.9(PA9) X3.11(PA11)
VDD_ADJ: C6.1(A) C14.1(A) C15.1(A) J1_19.1(P) L3.1(A) M2_53.1(P) M2_54.1(P)
VDD_GPIO: C1.1(A) C4.1(A) C7.1(A) C11.1(A) C12.1(A) J1_18.1(P) L2.1(A) M1.1(P) M1_2.1(P) M2_55.1(P) M2_56.1(P) R42.1(A) V4.2(E)
CLK_OUT: M1_19.1(P) M3_H4.1(P)
CTRL_IN0: J2_9.1(P) M3_H28.1(P) R4.2(Y) R13.1(A) R31.2(Y)
CTRL_IN1: J2_10.1(P) M3_H29.1(P) R5.2(Y) R14.1(A) R32.2(Y)
CTRL_IN2: J2_11.1(P) M3_G27.1(P) R6.2(Y) R15.1(A) R33.2(Y)
CTRL_IN3: J2_12.1(P) M3_G28.1(P) R7.2(Y) R16.1(A) R34.2(Y)
CTRL_OUT0: J2_1.1(P) M3_G21.1(P) R23.2(Y)
CTRL_OUT1: J2_2.1(P) M3_G22.1(P) R24.2(Y)
CTRL_OUT2: J2_3.1(P) M3_H25.1(P) R25.2(Y)
CTRL_OUT3: J2_4.1(P) M3_H26.1(P) R26.2(Y)
CTRL_OUT4: J2_5.1(P) M3_G24.1(P) R27.2(Y)
CTRL_OUT5: J2_6.1(P) M3_G25.1(P) R28.2(Y)
CTRL_OUT6: J2_7.1(P) M3_D23.1(P) R29.2(Y)
CTRL_OUT7: J2_8.1(P) M3_D24.1(P) R30.2(Y)
DATA_CLK_N: M1_38.1(P) M3_G7.1(P)
DATA_CLK_P: M1_40.1(P) M3_G6.1(P)
EN_AGC: J2_13.1(P) M3_H22.1(P) R8.2(Y) R17.1(A) R35.2(Y)
ENABLE: J2_15.1(P) M3_G18.1(P) R10.2(Y) R19.1(A) R37.2(Y)
FB_CLK_N: M1_8.1(P) M3_G13.1(P)
FB_CLK_P: M1_10.1(P) M3_G12.1(P)
GPIO8_N: J1_1.1(P) M1_23.1(P) R23.1(A)
GPIO8_P: J1_2.1(P) M1_25.1(P) R24.1(A)
GPIO12_N: J1_3.1(P) M1_33.1(P) R25.1(A)
GPIO12_P: J1_4.1(P) M1_35.1(P) R26.1(A)
GPIO14_N: J1_5.1(P) M1_37.1(P) R27.1(A)
GPIO14_P: J1_6.1(P) M1_39.1(P) R28.1(A)
GPIO16_N: J1_7.1(P) M1_43.1(P) R29.1(A)
GPIO16_P: J1_8.1(P) M1_45.1(P) R30.1(A)
GPIO18_N: J1_9.1(P) J1_15.1(P) M1_47.1(P) R31.1(A) R37.1(A)
GPIO18_P: J1_10.1(P) J1_16.1(P) M1_49.1(P) R32.1(A) R38.1(A)
I2C_SCL: M2_3.1(P) M3_C30.1(P)
I2C_SDA: M2_4.1(P) M3_C31.1(P)
JTAG_TCK: M2_39.1(P) X3.6(PA6)
JTAG_TDI: M2_38.1(P) X3.10(PA10)
JTAG_TDO: M2_40.1(P) X3.8(PA8)
JTAG_TMS: M2_37.1(P) X3.4(PA4)
P3_3V: C5.1(A) C20.1(A) C21.1(A) C22.1(A) C23.1(A) M3_C39.1(P) M3_D36.1(P) M3_D38.1(P) M3_D40.1(P) N1.4(OUT) N1.5(SENSE) R2.1(A) R22.1(A) V5.3(C)
PROG_IO: J1_11.1(P) M2_9.1(P) R33.1(A)
PWR_GOOD: C24.1(A) M3_D1.1(P) R22.2(Y) R40.2(Y)
RESET_BUTTON_N: R21.2(Y) S1.2(MAKEA) S1.4(MAKEB)
RESET_N: J1_17.1(P) M2_30.1(P) R39.1(A)
RESETB_N: J2_17.1(P) M3_H31.1(P) R12.1(A) R39.2(Y)
RX_D0_N: M1_58.1(P) M3_H8.1(P)
RX_D0_P: M1_60.1(P) M3_H7.1(P)
RX_D1_N: M1_54.1(P) M3_G10.1(P)
RX_D1_P: M1_56.1(P) M3_G9.1(P)
RX_D2_N: M1_48.1(P) M3_H11.1(P)
RX_D2_P: M1_50.1(P) M3_H10.1(P)
RX_D3_N: M1_44.1(P) M3_D12.1(P)
RX_D3_P: M1_46.1(P) M3_D11.1(P)
RX_D4_N: M1_34.1(P) M3_C11.1(P)
RX_D4_P: M1_36.1(P) M3_C10.1(P)
RX_D5_N: M1_57.1(P) M3_H14.1(P)
RX_D5_P: M1_59.1(P) M3_H13.1(P)
RX_FRAME_N: M1_53.1(P) M3_D9.1(P)
RX_FRAME_P: M1_55.1(P) M3_D8.1(P)
SPI_CLK: M1_3.1(P) M3_D27.1(P)
SPI_DI: M1_9.1(P) M3_C26.1(P)
SPI_DO: M1_7.1(P) M3_C27.1(P)
SPI_ENB: M1_5.1(P) M3_D26.1(P)
SYNC_IN: J2_14.1(P) M3_H23.1(P) R9.2(Y) R18.1(A) R36.2(Y)
TX_D0_N: M1_28.1(P) M3_H17.1(P)
TX_D0_P: M1_30.1(P) M3_H16.1(P)
TX_D1_N: M1_24.1(P) M3_G16.1(P)
TX_D1_P: M1_26.1(P) M3_G15.1(P)
TX_D2_N: M1_18.1(P) M3_D18.1(P)
TX_D2_P: M1_20.1(P) M3_D17.1(P)
TX_D3_N: M1_14.1(P) M3_C15.1(P)
TX_D3_P: M1_16.1(P) M3_C14.1(P)
TX_D4_N: M1_4.1(P) M3_C19.1(P)
TX_D4_P: M1_6.1(P) M3_C18.1(P)
TX_D5_N: M1_27.1(P) M3_H20.1(P)
TX_D5_P: M1_29.1(P) M3_H19.1(P)
TX_FRAME_N: M1_13.1(P) M3_D15.1(P)
TX_FRAME_P: M1_15.1(P) M3_D14.1(P)
TXNRX: J2_16.1(P) M3_G19.1(P) R11.2(Y) R20.1(A) R38.2(Y)
UNNAMED_1_CAPUNPOL5_I602_A: C17.1(A) R12.2(Y) R21.1(A)
UNNAMED_1_RESFIXED_I687_A: J1_14.1(P) R36.1(A)
UNNAMED_1_RESFIXED_I761_Y: C25.1(A) C26.1(A) R41.2(Y) V4.1(B) V4.3(C) V5.1(B)
USER_LED: J1_12.1(P) J1_13.1(P) M2_28.1(P) R34.1(A) R35.1(A)
VADJ: C16.1(A) C18.1(A) C19.1(A) J2_18.1(P) J2_19.1(P) L2.2(B) L3.2(B) M3_G39.1(P) M3_H40.1(P) R3.1(A) R13.2(Y) R14.2(Y) R15.2(Y) R16.2(Y) R17.2(Y) R18.2(Y) R19.2(Y) R20.2(Y) V5.2(E)
VADJ_LED: R3.2(Y) V3.2(A)

Pads without a net: M2_5 1; M2_6 1; M2_7 1; M2_8 1; M2_10 1; M2_13 1; M2_14 1; M2_15 1; M2_16 1; M2_17 1; M2_18 1; M2_19 1; M2_20 1; M2_23 1; M2_24 1; M2_25 1; M2_26 1; M2_27 1; M2_29 1; M2_33 1; M2_34 1; M2_36 1; M2_43 1; M2_44 1; M2_45 1; M2_46 1; M2_47 1; M2_48 1; M2_49 1; M2_50 1; M2_57 1; M2_58 1; M3 1; M3_C2 1; M3_C3 1; M3_C6 1; M3_C7 1; M3_C22 1; M3_C23 1; M3_C35 1; M3_C37 1; M3_D4 1; M3_D5 1; M3_D20 1; M3_D21 1; M3_D29 1; M3_D30 1; M3_D31 1; M3_D33 1; M3_D34 1; M3_G2 1; M3_G3 1; M3_G30 1; M3_G31 1; M3_G33 1; M3_G34 1; M3_G36 1; M3_G37 1; M3_H5 1; M3_H32 1; M3_H34 1; M3_H35 1; M3_H37 1; M3_H38 1; X3 1 12 13 14

## Via types
v1: diameter 0.702, hole 0.3, TOP to BOTTOM, 141 vias
v2: diameter 0.55, hole 0.25, TOP to BOTTOM, 269 vias
v3: diameter 1.402, hole 1, TOP to BOTTOM, 4 vias
v4: diameter 5, hole 3.2, TOP to BOTTOM, 4 vias
v5: diameter 1.702, hole 1.3, TOP to BOTTOM, 2 vias

## Routing (per net, layer and track width the routed paths; a pad name or vN(x,y) marks a point on that pad's centre or on a via; arc(x,y) is an arc through that point)
3.3V_AUX: length 165.4
  TOP w0.25: v2(72.44,46.88) 72.5,46.81 C9.1
  TOP w0.3: C10.1 72.4,51.84 v2(72.44,51.88)
  TOP w0.5: M3_D32.1 7.79,49.28 v2(8.39,48.68) ; v2(15.74,76.47) 16.64,77.38 X3.2
  BOTTOM w0.3: M2_59.1 71.85,46.95 71.92,46.88 v2(72.44,46.88) ; v2(72.44,52.68) 71.92,52.68 71.85,52.75 M2_60.1
  BOTTOM w0.5: v2(72.44,46.88) v2(72.44,47.68) v2(72.44,51.88) v2(72.44,52.68) 72.44,54.36 71.22,55.58 29.64,55.58 16.44,68.77 16.44,75.77 v2(15.74,76.47) 14.78,76.47 11.3,73 11.3,60.9 10.3,59.9 10.3,49.6 9.38,48.68 v2(8.39,48.68) 7.1,48.68 3.94,45.52 3.94,8.16 6,6.1 7.7,6.1 7.92,6.32 R40.1
3.3V_LED: length 39.4
  TOP w0.25: 53.49,41.22 59.78,41.22 78.5,22.5 81.6,22.5 82.6,21.5 V2.2
  TOP w0.8: 53.49,41.22 R2.2
5V_LED: length 40.1
  TOP w0.25: 54.09,37.03 58.02,37.03 81.7,13.35 V1.2
  TOP w0.8: R1.2 54.09,37.03
P5V: length 4.1
  TOP w0.4: C8.1 v2(57.3,48.5) ; v2(57.3,52.2) 57.36,52.26 C13.1
  BOTTOM w0.25: v2(57.3,52.2) 57.35,52.25 M2_2.1 ; M2.1 57.35,48.45 v2(57.3,48.5)
  vias: v1(52.3,31.1) v1(53.6,33.2) v1(53.6,32.2) v2(56.5,52.2) v2(57.3,50.1) v2(57.3,49.3)
PGND: length 1460.5
  TOP w0.15: 57.91,1.44 C1.2 57.44,1
  TOP w0.25: C15.2 69.26,52.16 v2(69.3,52.2) ; S1.1 35.22,82.7 35.14,82.77 v1(35.14,83.57) ; v2(8.39,43.58) 7.79,44.18 M3_D28.1 ; M3_C9.1 6.49,20.12 v2(5.84,19.48) ; M3_C32.1 6.49,49.33 v2(7.1,49.9) ; M3_H2.1 12.87,11.2 v2(12.24,10.57) ; v2(7.09,53.77) 6.51,54.35 M3_C36.1 ; v2(12.19,58.88) 11.6,59.47 M3_G40.1 ; M3_D3.1 7.79,12.48 v2(8.39,11.88) ; M3_D10.1 7.79,21.38 v2(8.39,20.78) ; M3_C29.1 6.51,45.45 v2(7.09,44.88) ; v2(13.49,57.58) 12.87,58.2 M3_H39.1 ; M3_H21.1 12.82,35.36 v2(12.24,34.77) ; v2(10.8,44.8) 11.1,45.1 11.18,45.1 M3_G29.1 ; v2(8.39,57.58) 7.79,58.18 M3_D39.1 ; v2(8.39,35.98) 7.79,36.58 M3_D22.1 ; M3_D6.1 7.79,16.28 v2(8.39,15.67) ; v2(5.84,41.08) 6.47,40.44 M3_C25.1 ; M3_C21.1 6.51,35.35 v2(7.09,34.77) ; M3_H30.1 12.88,46.79 v2(12.24,46.18) ; v2(69.84,45.98) 69.9,46.04 C7.2 ; M3_C5.1 6.51,14.95 v2(7.09,14.38) ; v2(12.19,18.28) 11.62,18.85 M3_G8.1 ; M3_D16.1 7.78,29.01 v2(7.14,28.38) ; M3_D37.1 v2(8.39,55.08) ; v2(7.09,29.68) 6.51,30.25 M3_C17.1 ; M3_D13.1 7.79,25.18 v2(7.14,24.58) ; v2(12.24,30.98) 12.82,31.55 M3_H18.1 ; v2(10.74,30.28) 11.6,30.27 M3_G17.1 ; M3_H24.1 12.89,39.17 v2(13.49,38.58) ; v2(13.54,43.58) 12.88,42.98 M3_H27.1 ; M3_G20.1 11.6,34.07 v2(10.94,34.77) ; S1.3 v1(24.94,82.47) ; M3_G23.1 11.6,37.87 v2(10.74,37.88) ; v2(5.9,10.5) 6.51,9.95 M3_C1.1 ; V1.1 84.55,10.85 ; v2(8.39,10.68) 7.83,11.23 M3_D2.1 ; M3_C8.1 6.42,18.85 v2(5.84,18.28) ; v2(8.39,52.48) 7.79,53.08 M3_D35.1 ; M3_H36.1 12.87,54.4 v2(13.49,53.77) ; v2(12.19,41.08) 11.6,41.67 M3_G26.1 ; M3_C16.1 6.5,29.01 v2(5.84,29.68) ; v2(12.19,9.38) 11.61,9.96 M3_G1.1 ; M3_G38.1 11.6,56.92 v2(12.24,56.27) ; M3_H9.1 13.79,20.12 v2(13.84,20.08) ; v2(73.44,46.88) 73.38,46.81 C9.2 ; v2(13.49,15.67) 12.87,16.3 M3_H6.1 ; M3_C24.1 6.44,39.17 v2(5.84,38.58) ; M3_G11.1 11.21,22.28 10.94,22.28 v2(10.64,21.98) ; M3_H3.1 v2(12.24,11.88) ; v2(7.09,13.17) 6.51,13.75 M3_C4.1 ; C17.2 v1(41.14,75.47) ; v2(7.14,24.58) M3_C13.1 6.46,25.2 v2(5.84,24.58) 6.49,23.93 M3_C12.1 7.14,24.55 v2(7.14,24.58) ; V2.1 84.65,18.05 ; v2(8.34,39.88) 7.79,40.43 M3_D25.1 ; v2(12.19,48.68) 11.6,49.27 M3_G32.1 ; C12.2 v2(71.4,49.9) ; M3_C40.1 6.51,59.45 v2(7.09,58.88) ; M3_C38.1 6.51,56.85 v2(7.09,56.27) ; C1.2 56.68,1.44 v2(56.64,1.48) ; V3.1 84.55,25.25 ; v2(12.19,52.48) 11.6,53.07 M3_G35.1 ; M3_D7.1 v2(8.39,16.98) ; M3_H12.1 12.87,23.9 v2(13.49,23.28) ; v2(7.09,43.58) 6.51,44.15 M3_C28.1 ; M3_G4.1 v2(12.19,13.17) ; M3_H33.1 v2(13.49,49.98) ; M3_G5.1 v2(10.94,14.47)
  TOP w0.3: C6.2 69.3,48.51 v2(69.34,48.48) ; X3.11 v1(26.64,71.97) ; C4.2 56.68,7.34 v2(56.64,7.38) ; R11.1 v1(35.56,74.27) ; v2(73.24,51.88) 73.28,51.84 C10.2 ; v1(31.34,70.25) 31.4,70.19 C16.2 ; M3_C34.1 6.51,51.79 v2(7.1,51.2) 7.1,51.19 M3_C33.1 6.51,50.48 v2(7.1,49.9) ; R5.1 v1(61.56,74.27) ; X3.9 v1(24.64,71.97) ; X3.5 v1(20.64,71.97) ; R9.1 v1(43.56,74.27) ; X3.7 v1(22.64,71.97) ; R4.1 v1(63.56,74.27) ; R6.1 v1(57.56,74.27) ; R8.1 v1(49.56,74.27) ; R10.1 v1(41.56,74.27) ; X3.3 v1(18.64,71.97) ; R7.1 v1(51.56,74.27)
  TOP w0.4: v2(58.2,48.5) 58.18,48.48 C8.2 ; C11.2 v1(35.26,67.27) ; C14.2 v1(32.76,67.27) ; C25.2 v2(37.44,51.58) ; C26.2 v2(37.44,48.38) ; C13.2 58.24,52.36 v2(58.4,52.2)
  TOP w0.5: v1(51.14,38.08) 49.69,38.08 C3.2 ; 37.3,35.4 37.3,33.9 ; R42.2 v2(41.84,52.77) ; 32.19,39.68 31.09,39.68 ; C5.2 50.04,39.73 v1(50.04,39.08) 50.04,38.18 49.79,37.93 C3.2 ; C5.2 50.09,40.23 50.24,40.08 v1(51.14,40.08) ; C5.2 49.29,40.23 49.04,39.98 v1(49.04,39.08) 49.04,38.18 49.29,37.93 C3.2 ; 32.14,35.17 31.14,35.17 ; 32.14,38.58 31.14,38.58 ; 36.1,35.3 36.1,33.8 ; 32.14,36.18 31.14,36.18 ; v1(40.6,38.6) 39.3,38.6 ; v1(40.6,36.6) 39.3,36.6 ; v1(40.6,40.6) 39.4,40.6 ; 32.14,37.38 31.14,37.38 ; M3_C20.1 6.51,34.05 v2(7.09,33.48) 7.75,32.82 M3_D19.1 ; 32.34,41.77 31.14,41.77 ; 32.29,40.68 31.19,40.68 ; v2(11.04,27.08) M3_G14.1 M3_H15.1 ; 38.7,35.3 38.7,33.8 ; 34.9,35.3 34.9,33.9
  TOP w0.65: v1(43.64,38.58) N1.3 v1(47.74,38.58)
  L2-GND w0.275: 75.34,0.74 v1(75.8,1.2) ; v1(75.8,1.2) 75.34,1.66 ; v1(75.8,1.2) 76.26,1.66 ; v1(75.8,1.2) 76.26,0.74 ; v2(11.04,27.08) 11.45,26.67 ; v2(11.04,27.08) 11.45,27.48 ; v2(11.04,27.08) 10.63,27.48 ; v2(11.04,27.08) 10.63,26.67 ; v1(18.64,71.97) 19.1,71.52 ; v1(18.64,71.97) 18.18,72.43 ; v1(18.64,71.97) 18.18,71.52 ; v1(18.64,71.97) 19.1,72.43 ; v1(58.7,33.1) 59.16,32.64 ; v1(58.7,33.1) 59.16,33.56 ; v1(58.7,33.1) 58.24,32.64 ; v1(58.7,33.1) 58.24,33.56 ; v2(71.4,49.9) 71.81,49.5 ; v2(71.4,49.9) 71,50.3 ; v2(71.4,49.9) 71,49.5 ; v2(71.4,49.9) 71.81,50.3 ; 17.34,89.26 v1(17.8,88.8) ; v1(17.8,88.8) 18.26,89.26 ; v1(17.8,88.8) 17.34,88.34 ; v1(17.8,88.8) 18.26,88.34 ; v1(49.8,88.8) 50.26,88.34 ; v1(49.8,88.8) 49.34,89.26 ; v1(49.8,88.8) 49.34,88.34 ; v1(49.8,88.8) 50.26,89.26 ; v1(30,1.2) 30.46,1.66 ; v1(30,1.2) 30.46,0.74 ; v1(30,1.2) 29.54,0.74 ; v1(30,1.2) 29.54,1.66 ; v1(1.2,40.4) 1.66,40.86 ; v1(1.2,40.4) 0.74,39.94 ; v1(1.2,40.4) 0.74,40.86 ; v1(1.2,40.4) 1.66,39.94 ; 79.44,88.34 v1(79.9,88.8) ; v1(79.9,88.8) 79.44,89.26 ; v1(79.9,88.8) 80.36,88.34 ; v1(79.9,88.8) 80.36,89.26 ; v2(13.49,15.67) 13.89,16.08 ; v2(13.49,15.67) 13.09,15.27 ; v2(13.49,15.67) 13.09,16.08 ; v2(13.49,15.67) 13.89,15.27 ; 21.54,0.74 v1(22,1.2) ; v1(22,1.2) 22.46,1.66 ; v1(22,1.2) 21.54,1.66 ; v1(22,1.2) 22.46,0.74 ; v2(62.44,6.97) 62.84,6.57 ; v2(62.44,6.97) 62.84,7.38 ; v2(62.44,6.97) 62.03,7.38 ; v2(62.44,6.97) 62.03,6.57 ; 84.34,83.94 v1(84.8,84.4) ; v1(84.8,84.4) 85.26,84.86 ; v1(84.8,84.4) 84.34,84.86 ; v1(84.8,84.4) 85.26,83.94 ; v2(64.84,54.68) 65.25,55.08 ; v2(64.84,54.68) 64.44,54.27 ; v2(64.84,54.68) 64.44,55.08 ; v2(64.84,54.68) 65.25,54.27 ; 63.1,73.82 v1(63.56,74.27) ; v1(63.56,74.27) 63.1,74.73 ; v1(63.56,74.27) 64.02,73.82 ; v1(63.56,74.27) 64.02,74.73 ; 40.14,39.06 v1(40.6,38.6) ; v1(40.6,38.6) 41.06,38.14 ; v1(40.6,38.6) 41.06,39.06 ; v1(40.6,38.6) 40.14,38.14 ; v1(1.2,60.4) 1.66,59.94 ; v1(1.2,60.4) 1.66,60.86 ; v1(1.2,60.4) 0.74,59.94 ; v1(1.2,60.4) 0.74,60.86 ; v1(84.8,76.4) 85.26,75.94 ; v1(84.8,76.4) 84.34,76.86 ; v1(84.8,76.4) 85.26,76.86 ; v1(84.8,76.4) 84.34,75.94 ; v1(49.04,39.08) 49.5,38.62 ; v1(49.04,39.08) 48.58,38.62 ; v1(49.04,39.08) 49.5,39.53 ; v1(49.04,39.08) 48.58,39.53 ; 64.44,46.38 v2(64.84,45.98) ; v2(64.84,45.98) 65.25,45.57 ; v2(64.84,45.98) 65.25,46.38 ; v2(64.84,45.98) 64.44,45.57 ; v1(84.8,24.4) 85.26,24.86 ; v1(84.8,24.4) 84.34,24.86 ; v1(84.8,24.4) 84.34,23.94 ; v1(84.8,24.4) 85.26,23.94 ; v1(69.8,88.8) 70.26,88.34 ; v1(69.8,88.8) 69.34,89.26 ; v1(69.8,88.8) 69.34,88.34 ; v1(69.8,88.8) 70.26,89.26 ; v2(7.09,14.38) 7.5,14.78 ; v2(7.09,14.38) 7.5,13.97 ; v2(7.09,14.38) 6.69,13.97 ; v2(7.09,14.38) 6.69,14.78 ; 34.68,84.03 v1(35.14,83.57) ; v1(35.14,83.57) 35.6,84.03 ; v1(35.14,83.57) 35.6,83.12 ; v1(35.14,83.57) 34.68,83.12 ; v2(13.49,53.77) 13.89,53.37 ; v2(13.49,53.77) 13.89,54.18 ; v2(13.49,53.77) 13.09,53.37 ; v2(13.49,53.77) 13.09,54.18 ; v1(84.8,68.4) 85.26,67.94 ; v1(84.8,68.4) 84.34,68.86 ; v1(84.8,68.4) 85.26,68.86 ; v1(84.8,68.4) 84.34,67.94 ; 2.87,75.85 F1.2 ; F1.2 2.87,77.9 ; F1.2 1.84,76.88 ; F1.2 3.9,76.88 ; v1(41.56,74.27) 42.02,74.73 ; v1(41.56,74.27) 42.02,73.82 ; v1(41.56,74.27) 41.1,73.82 ; v1(41.56,74.27) 41.1,74.73 ; 6.7,51.61 v2(7.1,51.2) ; v2(7.1,51.2) 7.5,50.8 ; v2(7.1,51.2) 6.7,50.8 ; v2(7.1,51.2) 7.5,51.61 ; v2(7.14,28.38) 7.54,28.78 ; v2(7.14,28.38) 6.74,28.78 ; v2(7.14,28.38) 6.74,27.97 ; v2(7.14,28.38) 7.54,27.97 ; v2(67.64,52.18) 68.05,51.77 ; v2(67.64,52.18) 68.05,52.58 ; v2(67.64,52.18) 67.23,52.58 ; v2(67.64,52.18) 67.23,51.77 ; 13.13,43.17 v2(13.54,43.58) ; v2(13.54,43.58) 13.13,43.98 ; v2(13.54,43.58) 13.95,43.98 ; v2(13.54,43.58) 13.95,43.17 ; 13.09,57.98 v2(13.49,57.58) ; v2(13.49,57.58) 13.89,57.98 ; v2(13.49,57.58) 13.89,57.17 ; v2(13.49,57.58) 13.09,57.17 ; 11.79,40.67 v2(12.19,41.08) ; v2(12.19,41.08) 12.59,40.67 ; v2(12.19,41.08) 11.79,41.48 ; v2(12.19,41.08) 12.59,41.48 ; v1(79.8,1.2) 80.26,0.74 ; v1(79.8,1.2) 79.34,0.74 ; v1(79.8,1.2) 79.34,1.66 ; v1(79.8,1.2) 80.26,1.66 ; v1(35.26,67.27) 35.72,67.73 ; v1(35.26,67.27) 34.8,67.73 ; v1(35.26,67.27) 35.72,66.82 ; v1(35.26,67.27) 34.8,66.82 ; v2(16.8,6.8) 17.2,7.21 ; v2(16.8,6.8) 16.39,7.21 ; v2(16.8,6.8) 16.39,6.39 ; v2(16.8,6.8) 17.2,6.39 ; 84.34,8.86 v1(84.8,8.4) ; v1(84.8,8.4) 85.26,7.94 ; v1(84.8,8.4) 84.34,7.94 ; v1(84.8,8.4) 85.26,8.86 ; v1(57.8,88.8) 58.26,89.26 ; v1(57.8,88.8) 57.34,88.34 ; v1(57.8,88.8) 57.34,89.26 ; v1(57.8,88.8) 58.26,88.34 ; 33.7,22.5 v2(34.1,22.9) ; v2(34.1,22.9) 33.7,23.3 ; v2(34.1,22.9) 34.5,22.5 ; v2(34.1,22.9) 34.5,23.3 ; v1(41.14,75.47) 41.6,75.93 ; v1(41.14,75.47) 40.68,75.93 ; v1(41.14,75.47) 40.68,75.02 ; v1(41.14,75.47) 41.6,75.02 ; 69.44,46.38 v2(69.84,45.98) ; v2(69.84,45.98) 70.25,45.57 ; v2(69.84,45.98) 69.44,45.57 ; v2(69.84,45.98) 70.25,46.38 ; 5.44,38.98 v2(5.84,38.58) ; v2(5.84,38.58) 5.44,38.17 ; v2(5.84,38.58) 6.25,38.98 ; v2(5.84,38.58) 6.25,38.17 ; 5.44,29.27 v2(5.84,29.68) ; v2(5.84,29.68) 6.25,30.08 ; v2(5.84,29.68) 6.25,29.27 ; v2(5.84,29.68) 5.44,30.08 ; 25.54,0.74 v1(26,1.2) ; v1(26,1.2) 26.46,0.74 ; v1(26,1.2) 25.54,1.66 ; v1(26,1.2) 26.46,1.66 ; 84.34,19.94 v1(84.8,20.4) ; v1(84.8,20.4) 85.26,20.86 ; v1(84.8,20.4) 84.34,20.86 ; v1(84.8,20.4) 85.26,19.94 ; v1(42,1.2) 42.46,1.66 ; v1(42,1.2) 41.54,0.74 ; v1(42,1.2) 41.54,1.66 ; v1(42,1.2) 42.46,0.74 ; v2(8.39,16.98) 8.79,16.57 ; v2(8.39,16.98) 7.99,16.57 ; v2(8.39,16.98) 7.99,17.38 ; v2(8.39,16.98) 8.79,17.38 ; v2(7.09,43.58) 7.5,43.17 ; v2(7.09,43.58) 6.69,43.98 ; v2(7.09,43.58) 6.69,43.17 ; v2(7.09,43.58) 7.5,43.98 ; 0.74,44.86 v1(1.2,44.4) ; v1(1.2,44.4) 1.66,44.86 ; v1(1.2,44.4) 0.74,43.94 ; v1(1.2,44.4) 1.66,43.94 ; v2(8.39,55.08) 8.79,54.67 ; v2(8.39,55.08) 7.99,55.48 ; v2(8.39,55.08) 7.99,54.67 ; v2(8.39,55.08) 8.79,55.48 ; 9.44,88.34 v1(9.9,88.8) ; v1(9.9,88.8) 9.44,89.26 ; v1(9.9,88.8) 10.36,88.34 ; v1(9.9,88.8) 10.36,89.26 ; v2(13.84,20.08) 14.25,19.67 ; v2(13.84,20.08) 13.43,20.48 ; v2(13.84,20.08) 13.43,19.67 ; v2(13.84,20.08) 14.25,20.48 ; 11.79,58.47 v2(12.19,58.88) ; v2(12.19,58.88) 12.59,58.47 ; v2(12.19,58.88) 12.59,59.28 ; v2(12.19,58.88) 11.79,59.28 ; v1(50,1.2) 50.46,1.66 ; v1(50,1.2) 49.54,0.74 ; v1(50,1.2) 50.46,0.74 ; v1(50,1.2) 49.54,1.66 ; v2(17.2,65.8) 17.61,65.39 ; v2(17.2,65.8) 17.61,66.2 ; v2(17.2,65.8) 16.8,65.39 ; v2(17.2,65.8) 16.8,66.2 ; v1(51.14,40.08) 51.6,39.62 ; v1(51.14,40.08) 51.6,40.53 ; v1(51.14,40.08) 50.68,39.62 ; v1(51.14,40.08) 50.68,40.53 ; 61.94,45.57 v2(62.34,45.98) ; v2(62.34,45.98) 62.74,46.38 ; v2(62.34,45.98) 61.94,46.38 ; v2(62.34,45.98) 62.74,45.57 ; v1(1.2,24.4) 1.66,23.94 ; v1(1.2,24.4) 1.66,24.86 ; v1(1.2,24.4) 0.74,24.86 ; v1(1.2,24.4) 0.74,23.94 ; v2(69.34,48.48) 69.75,48.07 ; v2(69.34,48.48) 69.75,48.88 ; v2(69.34,48.48) 68.94,48.07 ; v2(69.34,48.48) 68.94,48.88 ; v2(12.24,56.27) 12.64,55.87 ; v2(12.24,56.27) 11.84,56.68 ; v2(12.24,56.27) 11.84,55.87 ; v2(12.24,56.27) 12.64,56.68 ; v1(13.8,88.8) 14.26,88.34 ; v1(13.8,88.8) 13.34,89.26 ; v1(13.8,88.8) 14.26,89.26 ; v1(13.8,88.8) 13.34,88.34 ; 30.88,70.71 v1(31.34,70.25) ; v1(31.34,70.25) 31.8,69.8 ; v1(31.34,70.25) 31.8,70.71 ; v1(31.34,70.25) 30.88,69.8 ; v2(69.8,54.7) 70.2,55.11 ; v2(69.8,54.7) 69.4,55.11 ; v2(69.8,54.7) 70.2,54.3 ; v2(69.8,54.7) 69.4,54.3 ; 33.54,1.66 v1(34,1.2) ; v1(34,1.2) 34.46,1.66 ; v1(34,1.2) 34.46,0.74 ; v1(34,1.2) 33.54,0.74 ; v2(38.4,31.6) 38.8,32.01 ; v2(38.4,31.6) 38,31.2 ; v2(38.4,31.6) 38,32.01 ; v2(38.4,31.6) 38.8,31.2 ; 84.34,55.94 v1(84.8,56.4) ; v1(84.8,56.4) 85.26,55.94 ; v1(84.8,56.4) 84.34,56.86 ; v1(84.8,56.4) 85.26,56.86 ; v1(35.56,74.27) 36.02,74.73 ; v1(35.56,74.27) 36.02,73.82 ; v1(35.56,74.27) 35.1,74.73 ; v1(35.56,74.27) 35.1,73.82 ; v2(7.09,53.77) 7.5,53.37 ; v2(7.09,53.77) 7.5,54.18 ; v2(7.09,53.77) 6.69,54.18 ; v2(7.09,53.77) 6.69,53.37 ; v2(59.54,9.47) 59.95,9.88 ; v2(59.54,9.47) 59.13,9.07 ; v2(59.54,9.47) 59.95,9.07 ; v2(59.54,9.47) 59.13,9.88 ; 61.1,73.82 v1(61.56,74.27) ; v1(61.56,74.27) 62.02,73.82 ; v1(61.56,74.27) 61.1,74.73 ; v1(61.56,74.27) 62.02,74.73 ; 28.58,41.02 v1(29.04,41.48) ; v1(29.04,41.48) 29.5,41.02 ; v1(29.04,41.48) 28.58,41.93 ; v1(29.04,41.48) 29.5,41.93 ; 73.3,42.8 v2(73.7,42.4) ; v2(73.7,42.4) 74.11,42.8 ; v2(73.7,42.4) 74.11,42 ; v2(73.7,42.4) 73.3,42 ; 10.23,21.57 v2(10.64,21.98) ; v2(10.64,21.98) 11.04,21.57 ; v2(10.64,21.98) 11.04,22.38 ; v2(10.64,21.98) 10.23,22.38 ; 57.8,48.91 v2(58.2,48.5) ; v2(58.2,48.5) 58.6,48.91 ; v2(58.2,48.5) 57.8,48.09 ; v2(58.2,48.5) 58.6,48.09 ; 7.93,40.28 v2(8.34,39.88) ; v2(8.34,39.88) 8.74,39.47 ; v2(8.34,39.88) 8.74,40.28 ; v2(8.34,39.88) 7.93,39.47 ; 0.74,79.94 v1(1.2,80.4) ; v1(1.2,80.4) 1.66,79.94 ; v1(1.2,80.4) 0.74,80.86 ; v1(1.2,80.4) 1.66,80.86 ; v2(26.2,18.8) 26.61,19.21 ; v2(26.2,18.8) 26.61,18.39 ; v2(26.2,18.8) 25.8,19.21 ; v2(26.2,18.8) 25.8,18.39 ; v1(32.76,67.27) 33.22,67.73 ; v1(32.76,67.27) 33.22,66.82 ; v1(32.76,67.27) 32.3,66.82 ; v1(32.76,67.27) 32.3,67.73 ; 72.83,51.47 v2(73.24,51.88) ; v2(73.24,51.88) 73.64,51.47 ; v2(73.24,51.88) 73.64,52.28 ; v2(12.24,34.77) 12.64,34.37 ; v2(12.24,34.77) 12.64,35.18 ; v2(12.24,34.77) 11.84,35.18 ; v2(12.24,34.77) 11.84,34.37 ; 7.99,15.27 v2(8.39,15.67) ; v2(8.39,15.67) 7.99,16.08 ; v2(8.39,15.67) 8.79,16.08 ; v2(8.39,15.67) 8.79,15.27 ; 0.74,83.94 v1(1.2,84.4) ; v1(1.2,84.4) 0.74,84.86 ; v1(1.2,84.4) 1.66,84.86 ; v1(1.2,84.4) 1.66,83.94 ; 13.54,1.66 v1(14,1.2) ; v1(14,1.2) 14.46,0.74 ; v1(14,1.2) 13.54,0.74 ; v1(14,1.2) 14.46,1.66 ; v2(69.9,26.5) 70.31,26.1 ; v2(69.9,26.5) 69.5,26.91 ; v2(69.9,26.5) 69.5,26.1 ; v2(69.9,26.5) 70.31,26.91 ; v1(40.6,40.6) 41.06,40.14 ; v1(40.6,40.6) 40.14,41.06 ; v1(40.6,40.6) 40.14,40.14 ; v1(40.6,40.6) 41.06,41.06 ; 6.69,12.77 v2(7.09,13.17) ; v2(7.09,13.17) 7.5,13.58 ; v2(7.09,13.17) 6.69,13.58 ; v2(7.09,13.17) 7.5,12.77 ; 28.58,39.02 v1(29.04,39.48) ; v1(29.04,39.48) 28.58,39.93 ; v1(29.04,39.48) 29.5,39.93 ; v1(29.04,39.48) 29.5,39.02 ; 43.1,74.73 v1(43.56,74.27) ; v1(43.56,74.27) 43.1,73.82 ; v1(43.56,74.27) 44.02,74.73 ; v1(43.56,74.27) 44.02,73.82 ; v1(1.2,64.4) 1.66,64.86 ; v1(1.2,64.4) 1.66,63.94 ; v1(1.2,64.4) 0.74,64.86 ; v1(1.2,64.4) 0.74,63.94 ; v2(19.9,23.8) 20.3,23.4 ; v2(19.9,23.8) 19.49,24.21 ; v2(19.9,23.8) 19.49,23.4 ; v2(19.9,23.8) 20.3,24.21 ; 53.34,88.34 v1(53.8,88.8) ; v1(53.8,88.8) 53.34,89.26 ; v1(53.8,88.8) 54.26,88.34 ; v1(53.8,88.8) 54.26,89.26 ; v2(28.7,6.3) 29.11,5.89 ; v2(28.7,6.3) 29.11,6.71 ; v2(28.7,6.3) 28.3,6.71 ; v2(28.7,6.3) 28.3,5.89 ; v1(84.8,32.4) 85.26,32.86 ; v1(84.8,32.4) 85.26,31.94 ; v1(84.8,32.4) 84.34,31.94 ; v1(84.8,32.4) 84.34,32.86 ; v2(22.7,36) 23.11,36.41 ; v2(22.7,36) 22.3,35.59 ; v2(22.7,36) 22.3,36.41 ; v2(22.7,36) 23.11,35.59 ; 51.09,23.71 v2(51.5,23.3) ; v2(51.5,23.3) 51.91,23.71 ; v2(51.5,23.3) 51.09,22.9 ; v2(51.5,23.3) 51.91,22.9 ; v1(84.8,40.4) 85.26,39.94 ; v1(84.8,40.4) 84.34,39.94 ; v1(84.8,40.4) 85.26,40.86 ; v1(84.8,40.4) 84.34,40.86 ; 65.34,89.26 v1(65.8,88.8) ; v1(65.8,88.8) 66.26,88.34 ; v1(65.8,88.8) 66.26,89.26 ; v1(65.8,88.8) 65.34,88.34 ; 69.13,1.18 v2(69.54,0.77) 69.94,1.18 ; v3(55.36,48.3) 56.07,47.59 ; v3(55.36,48.3) 54.66,49 ; v3(55.36,48.3) 54.66,47.59 ; v3(55.36,48.3) 56.07,49 ; v2(34.5,78.8) 34.91,78.39 ; v2(34.5,78.8) 34.09,78.39 ; v2(34.5,78.8) 34.09,79.2 ; v2(34.5,78.8) 34.91,79.2 ; v2(13.49,23.28) 13.89,23.68 ; v2(13.49,23.28) 13.09,23.68 ; v2(13.49,23.28) 13.89,22.87 ; v2(13.49,23.28) 13.09,22.87 ; 0.74,75.94 v1(1.2,76.4) ; v1(1.2,76.4) 1.66,75.94 ; v1(1.2,76.4) 1.66,76.86 ; v1(1.2,76.4) 0.74,76.86 ; v2(12.24,10.57) 12.64,10.98 ; v2(12.24,10.57) 11.84,10.98 ; v2(12.24,10.57) 12.64,10.17 ; v2(12.24,10.57) 11.84,10.17 ; 10.39,45.2 v2(10.8,44.8) ; v2(10.8,44.8) 11.21,44.4 ; v2(10.8,44.8) 10.39,44.4 ; v2(10.8,44.8) 11.21,45.2 ; v1(84.8,16.4) 85.26,15.94 ; v1(84.8,16.4) 85.26,16.86 ; v1(84.8,16.4) 84.34,15.94 ; v1(84.8,16.4) 84.34,16.86 ; v1(1.2,16.4) 1.66,16.86 ; v1(1.2,16.4) 1.66,15.94 ; v1(1.2,16.4) 0.74,16.86 ; v1(1.2,16.4) 0.74,15.94 ; v2(12.24,46.18) 12.64,45.77 ; v2(12.24,46.18) 11.84,45.77 ; v2(12.24,46.18) 11.84,46.58 ; v2(12.24,46.18) 12.64,46.58 ; v1(41.8,88.8) 42.26,89.26 ; v1(41.8,88.8) 41.34,89.26 ; v1(41.8,88.8) 41.34,88.34 ; v1(41.8,88.8) 42.26,88.34 ; v1(20.64,71.97) 21.1,72.43 ; v1(20.64,71.97) 20.18,71.52 ; v1(20.64,71.97) 21.1,71.52 ; v1(20.64,71.97) 20.18,72.43 ; v2(27.1,45.8) 27.5,46.2 ; v2(27.1,45.8) 26.7,45.4 ; v2(27.1,45.8) 26.7,46.2 ; v2(27.1,45.8) 27.5,45.4 ; 6.69,34.37 v2(7.09,34.77) ; v2(7.09,34.77) 7.5,34.37 ; v2(7.09,34.77) 7.5,35.18 ; v2(7.09,34.77) 6.69,35.18 ; v1(1.2,52.4) 1.66,51.94 ; v1(1.2,52.4) 0.74,52.86 ; v1(1.2,52.4) 0.74,51.94 ; v1(1.2,52.4) 1.66,52.86 ; 41.44,52.37 v2(41.84,52.77) ; v2(41.84,52.77) 42.24,52.37 ; v2(41.84,52.77) 41.44,53.18 ; v2(41.84,52.77) 42.24,53.18 ; v2(64.64,6.97) 65.05,6.57 ; v2(64.64,6.97) 64.23,6.57 ; v2(64.64,6.97) 64.23,7.38 ; v2(64.64,6.97) 65.05,7.38 ; v2(7.09,58.88) 7.5,59.28 ; v2(7.09,58.88) 6.69,58.47 ; v2(7.09,58.88) 7.5,58.47 ; v2(7.09,58.88) 6.69,59.28 ; 67.03,1.18 v2(67.44,0.77) 67.84,1.18 ; v1(1.2,68.4) 1.66,68.86 ; v1(1.2,68.4) 1.66,67.94 ; v1(1.2,68.4) 0.74,68.86 ; v1(1.2,68.4) 0.74,67.94 ; v2(73.7,34.5) 74.11,34.09 ; v2(73.7,34.5) 73.3,34.09 ; v2(73.7,34.5) 74.11,34.91 ; v2(73.7,34.5) 73.3,34.91 ; v1(37.8,88.8) 38.26,89.26 ; v1(37.8,88.8) 38.26,88.34 ; v1(37.8,88.8) 37.34,89.26 ; v1(37.8,88.8) 37.34,88.34 ; v1(1.2,36.4) 1.66,36.86 ; v1(1.2,36.4) 0.74,35.94 ; v1(1.2,36.4) 1.66,35.94 ; v1(1.2,36.4) 0.74,36.86 ; 84.34,64.86 v1(84.8,64.4) ; v1(84.8,64.4) 84.34,63.94 ; v1(84.8,64.4) 85.26,64.86 ; v1(84.8,64.4) 85.26,63.94 ; v1(84.8,52.4) 85.26,52.86 ; v1(84.8,52.4) 84.34,51.94 ; v1(84.8,52.4) 84.34,52.86 ; v1(84.8,52.4) 85.26,51.94 ; v1(51.14,38.08) 51.6,37.62 ; v1(51.14,38.08) 50.68,38.53 ; v1(51.14,38.08) 51.6,38.53 ; v1(51.14,38.08) 50.68,37.62 ; v1(29.04,37.48) 29.5,37.93 ; v1(29.04,37.48) 28.58,37.93 ; v1(29.04,37.48) 28.58,37.02 ; v1(29.04,37.48) 29.5,37.02 ; 7.99,11.08 v2(8.39,10.68) ; v2(8.39,10.68) 8.79,10.27 ; v2(8.39,10.68) 7.99,10.27 ; v2(8.39,10.68) 8.79,11.08 ; v4(3,87) 4.48,88.48 ; v4(3,87) 1.52,85.52 ; v4(3,87) 1.52,88.48 ; v4(3,87) 4.48,85.52 ; v1(1.2,56.4) 1.66,55.94 ; v1(1.2,56.4) 0.74,56.86 ; v1(1.2,56.4) 1.66,56.86 ; v1(1.2,56.4) 0.74,55.94 ; 64.44,1.18 v2(64.84,0.77) 65.25,1.18 ; v2(8.39,57.58) 8.79,57.98 ; v2(8.39,57.58) 8.79,57.17 ; v2(8.39,57.58) 7.99,57.98 ; v2(8.39,57.58) 7.99,57.17 ; 10.34,29.87 v2(10.74,30.28) ; v2(10.74,30.28) 11.14,30.68 ; v2(10.74,30.28) 11.14,29.87 ; v2(10.74,30.28) 10.34,30.68 ; v2(8.39,52.48) 8.79,52.88 ; v2(8.39,52.48) 8.79,52.07 ; v2(8.39,52.48) 7.99,52.07 ; v2(8.39,52.48) 7.99,52.88 ; 57.3,78.3 v2(57.7,77.9) ; v2(57.7,77.9) 58.1,77.49 ; v2(57.7,77.9) 58.1,78.3 ; v2(57.7,77.9) 57.3,77.49 ; 57.99,52.61 v2(58.4,52.2) ; v2(58.4,52.2) 57.99,51.8 ; v2(58.4,52.2) 58.8,52.61 ; v2(58.4,52.2) 58.8,51.8 ; 0.74,8.86 v1(1.2,8.4) ; v1(1.2,8.4) 1.66,8.86 ; v1(1.2,8.4) 0.74,7.94 ; v1(1.2,8.4) 1.66,7.94 ; 58.24,32.56 v1(58.7,32.1) ; v1(58.7,32.1) 59.16,31.64 ; v1(58.7,32.1) 59.16,32.56 ; v1(58.7,32.1) 58.24,31.64 ; v1(21.8,88.8) 22.26,89.26 ; v1(21.8,88.8) 21.34,89.26 ; v1(21.8,88.8) 22.26,88.34 ; v1(21.8,88.8) 21.34,88.34 ; v1(84.8,28.4) 85.26,28.86 ; v1(84.8,28.4) 85.26,27.94 ; v1(84.8,28.4) 84.34,27.94 ; v1(84.8,28.4) 84.34,28.86 ; 29.58,38.02 v1(30.04,38.48) ; v1(30.04,38.48) 30.5,38.93 ; v1(30.04,38.48) 30.5,38.02 ; v1(30.04,38.48) 29.58,38.93 ; 73.13,47.59 v3(73.84,48.3) ; v3(73.84,48.3) 74.54,49 ; v3(73.84,48.3) 74.54,47.59 ; v3(73.84,48.3) 73.13,49 ; v1(84.8,36.4) 85.26,35.94 ; v1(84.8,36.4) 84.34,36.86 ; v1(84.8,36.4) 84.34,35.94 ; v1(84.8,36.4) 85.26,36.86 ; 5.44,17.87 v2(5.84,18.28) ; v2(5.84,18.28) 6.25,17.87 ; v2(5.84,18.28) 5.44,18.68 ; v2(5.84,18.28) 6.25,18.68 ; v1(18,1.2) 18.46,1.66 ; v1(18,1.2) 17.54,1.66 ; v1(18,1.2) 18.46,0.74 ; v1(18,1.2) 17.54,0.74 ; 0.74,31.94 v1(1.2,32.4) ; v1(1.2,32.4) 0.74,32.86 ; v1(1.2,32.4) 1.66,31.94 ; v1(1.2,32.4) 1.66,32.86 ; 37.03,51.17 v2(37.44,51.58) ; v2(37.44,51.58) 37.03,51.98 ; v2(37.44,51.58) 37.84,51.17 ; v2(37.44,51.58) 37.84,51.98 ; 48.59,15.89 v2(49,16.3) ; v2(49,16.3) 48.59,16.71 ; v2(49,16.3) 49.41,15.89 ; v2(49,16.3) 49.41,16.71 ; 45.54,1.66 v1(46,1.2) ; v1(46,1.2) 46.46,1.66 ; v1(46,1.2) 45.54,0.74 ; v1(46,1.2) 46.46,0.74 ; 84.34,11.94 v1(84.8,12.4) ; v1(84.8,12.4) 85.26,11.94 ; v1(84.8,12.4) 84.34,12.86 ; v1(84.8,12.4) 85.26,12.86 ; v2(13.49,38.58) 13.89,38.98 ; v2(13.49,38.58) 13.89,38.17 ; v2(13.49,38.58) 13.09,38.98 ; v2(13.49,38.58) 13.09,38.17 ; 11.84,12.28 v2(12.24,11.88) ; v2(12.24,11.88) 11.84,11.47 ; v2(12.24,11.88) 12.64,11.47 ; v2(12.24,11.88) 12.64,12.28 ; 11.79,52.07 v2(12.19,52.48) ; v2(12.19,52.48) 12.59,52.07 ; v2(12.19,52.48) 11.79,52.88 ; v2(12.19,52.48) 12.59,52.88 ; v1(51.56,74.27) 52.02,73.82 ; v1(51.56,74.27) 51.1,73.82 ; v1(51.56,74.27) 51.1,74.73 ; v1(51.56,74.27) 52.02,74.73 ; v1(75.8,88.8) 76.26,89.26 ; v1(75.8,88.8) 75.34,88.34 ; v1(75.8,88.8) 75.34,89.26 ; v1(75.8,88.8) 76.26,88.34 ; 10.34,38.28 v2(10.74,37.88) ; v2(10.74,37.88) 11.14,37.47 ; v2(10.74,37.88) 11.14,38.28 ; v2(10.74,37.88) 10.34,37.47 ; 6.69,30.08 v2(7.09,29.68) ; v2(7.09,29.68) 7.5,30.08 ; v2(7.09,29.68) 7.5,29.27 ; v2(7.09,29.68) 6.69,29.27 ; 45.34,89.26 v1(45.8,88.8) ; v1(45.8,88.8) 45.34,88.34 ; v1(45.8,88.8) 46.26,89.26 ; v1(45.8,88.8) 46.26,88.34 ; v2(7.09,56.27) 7.5,55.87 ; v2(7.09,56.27) 6.69,56.68 ; v2(7.09,56.27) 7.5,56.68 ; v2(7.09,56.27) 6.69,55.87 ; 68.9,51.8 v2(69.3,52.2) ; v2(69.3,52.2) 69.7,52.61 ; v2(69.3,52.2) 68.9,52.61 ; v2(69.3,52.2) 69.7,51.8 ; 81.52,5.08 v4(83,3.6) ; v4(83,3.6) 84.48,2.12 ; v4(83,3.6) 84.48,5.08 ; v4(83,3.6) 81.52,2.12 ; v2(10.94,34.77) 11.35,35.18 ; v2(10.94,34.77) 10.54,35.18 ; v2(10.94,34.77) 11.35,34.37 ; v2(10.94,34.77) 10.54,34.37 ; v2(7.09,33.48) 7.5,33.07 ; v2(7.09,33.48) 7.5,33.88 ; v2(7.09,33.48) 6.69,33.07 ; v2(7.09,33.48) 6.69,33.88 ; v3(73.84,3.09) 74.54,2.38 ; v3(73.84,3.09) 74.54,3.79 ; v3(73.84,3.09) 73.13,2.38 ; v3(73.84,3.09) 73.13,3.79 ; v2(47.1,78.3) 47.51,77.89 ; v2(47.1,78.3) 46.7,78.7 ; v2(47.1,78.3) 46.7,77.89 ; v2(47.1,78.3) 47.51,78.7 ; v2(56.64,7.38) 57.05,6.97 ; v2(56.64,7.38) 56.23,6.97 ; v2(56.64,7.38) 56.23,7.78 ; v2(56.64,7.38) 57.05,7.78 ; 84.34,79.94 v1(84.8,80.4) ; v1(84.8,80.4) 85.26,80.86 ; v1(84.8,80.4) 85.26,79.94 ; v1(84.8,80.4) 84.34,80.86 ; v2(45.7,7.1) 46.1,6.7 ; v2(45.7,7.1) 45.3,7.5 ; v2(45.7,7.1) 45.3,6.7 ; v2(45.7,7.1) 46.1,7.5 ; v2(64.2,42.1) 64.6,41.7 ; v2(64.2,42.1) 64.6,42.51 ; v2(64.2,42.1) 63.8,41.7 ; v2(64.2,42.1) 63.8,42.51 ; v2(5.84,24.58) 6.25,24.98 ; v2(5.84,24.58) 5.44,24.17 ; v2(5.84,24.58) 6.25,24.17 ; v2(5.84,24.58) 5.44,24.98 ; v2(67.34,45.98) 67.75,45.57 ; v2(67.34,45.98) 67.75,46.38 ; v2(67.34,45.98) 66.94,45.57 ; v2(67.34,45.98) 66.94,46.38 ; 84.34,71.94 v1(84.8,72.4) ; v1(84.8,72.4) 85.26,72.86 ; v1(84.8,72.4) 85.26,71.94 ; v1(84.8,72.4) 84.34,72.86 ; 22.3,41.7 v2(22.7,41.3) ; v2(22.7,41.3) 22.3,40.9 ; v2(22.7,41.3) 23.11,40.9 ; v2(22.7,41.3) 23.11,41.7 ; 73.34,89.26 v1(73.8,88.8) ; v1(73.8,88.8) 74.26,89.26 ; v1(73.8,88.8) 74.26,88.34 ; v1(73.8,88.8) 73.34,88.34 ; v2(5.84,41.08) 6.25,41.48 ; v2(5.84,41.08) 5.44,41.48 ; v2(5.84,41.08) 5.44,40.67 ; v2(5.84,41.08) 6.25,40.67 ; v2(59.84,45.98) 60.24,46.38 ; v2(59.84,45.98) 59.44,45.57 ; v2(59.84,45.98) 59.44,46.38 ; v2(59.84,45.98) 60.24,45.57 ; 56.23,1.07 v2(56.64,1.48) ; v2(56.64,1.48) 56.23,1.88 ; v2(56.64,1.48) 57.05,1.88 ; v2(56.64,1.48) 57.05,1.07 ; 24.18,71.52 v1(24.64,71.97) ; v1(24.64,71.97) 24.18,72.43 ; v1(24.64,71.97) 25.1,71.52 ; v1(24.64,71.97) 25.1,72.43 ; 66.19,77.59 v2(66.6,78) ; v2(66.6,78) 67,77.59 ; v2(66.6,78) 67,78.41 ; v2(66.6,78) 66.19,78.41 ; 59.99,28.6 v2(60.4,29) ; v2(60.4,29) 60.8,28.6 ; v2(60.4,29) 60.8,29.41 ; v2(60.4,29) 59.99,29.41 ; 5.34,88.34 v1(5.8,88.8) ; v1(5.8,88.8) 5.34,89.26 ; v1(5.8,88.8) 6.26,89.26 ; v1(5.8,88.8) 6.26,88.34 ; v2(35.5,14.3) 35.91,14.71 ; v2(35.5,14.3) 35.91,13.89 ; v2(35.5,14.3) 35.09,14.71 ; v2(35.5,14.3) 35.09,13.89 ; 53.54,0.74 v1(54,1.2) ; v1(54,1.2) 54.46,0.74 ; v1(54,1.2) 53.54,1.66 ; v1(54,1.2) 54.46,1.66 ; v1(6,1.2) 6.46,1.66 ; v1(6,1.2) 5.54,0.74 ; v1(6,1.2) 6.46,0.74 ; v1(6,1.2) 5.54,1.66 ; 28.58,35.02 v1(29.04,35.48) ; v1(29.04,35.48) 29.5,35.02 ; v1(29.04,35.48) 28.58,35.93 ; v1(29.04,35.48) 29.5,35.93 ; v2(62.34,54.68) 62.74,55.08 ; v2(62.34,54.68) 61.94,55.08 ; v2(62.34,54.68) 62.74,54.27 ; v2(62.34,54.68) 61.94,54.27 ; v2(13.3,84.3) 13.71,83.89 ; v2(13.3,84.3) 12.89,84.7 ; v2(13.3,84.3) 12.89,83.89 ; v2(13.3,84.3) 13.71,84.7 ; v1(24.94,82.47) 25.4,82.93 ; v1(24.94,82.47) 25.4,82.02 ; v1(24.94,82.47) 24.48,82.02 ; v1(24.94,82.47) 24.48,82.93 ; v2(37.44,48.38) 37.84,47.97 ; v2(37.44,48.38) 37.03,48.78 ; v2(37.44,48.38) 37.03,47.97 ; v2(37.44,48.38) 37.84,48.78 ; 84.34,44.86 v1(84.8,44.4) ; v1(84.8,44.4) 84.34,43.94 ; v1(84.8,44.4) 85.26,44.86 ; v1(84.8,44.4) 85.26,43.94 ; v1(33.8,88.8) 34.26,88.34 ; v1(33.8,88.8) 33.34,88.34 ; v1(33.8,88.8) 33.34,89.26 ; v1(33.8,88.8) 34.26,89.26 ; v1(57.6,31.1) 58.06,30.64 ; v1(57.6,31.1) 57.14,31.56 ; v1(57.6,31.1) 58.06,31.56 ; v1(57.6,31.1) 57.14,30.64 ; v2(5.84,19.48) 6.25,19.07 ; v2(5.84,19.48) 6.25,19.88 ; v2(5.84,19.48) 5.44,19.88 ; v2(5.84,19.48) 5.44,19.07 ; v2(10.94,14.47) 11.35,14.88 ; v2(10.94,14.47) 11.35,14.07 ; v2(10.94,14.47) 10.54,14.07 ; v2(10.94,14.47) 10.54,14.88 ; v2(70.24,6.97) 70.65,7.38 ; v2(70.24,6.97) 69.84,6.57 ; v2(70.24,6.97) 69.84,7.38 ; v2(70.24,6.97) 70.65,6.57 ; 13.09,49.57 v2(13.49,49.98) ; v2(13.49,49.98) 13.89,49.57 ; v2(13.49,49.98) 13.89,50.38 ; v2(13.49,49.98) 13.09,50.38 ; 84.34,48.86 v1(84.8,48.4) ; v1(84.8,48.4) 85.26,47.94 ; v1(84.8,48.4) 85.26,48.86 ; v1(84.8,48.4) 84.34,47.94 ; 18.7,57.7 v2(19.1,57.3) ; v2(19.1,57.3) 19.51,57.7 ; v2(19.1,57.3) 19.51,56.9 ; v2(19.1,57.3) 18.7,56.9 ; 7.99,35.57 v2(8.39,35.98) ; v2(8.39,35.98) 8.79,35.57 ; v2(8.39,35.98) 8.79,36.38 ; v2(8.39,35.98) 7.99,36.38 ; 73.03,47.28 v2(73.44,46.88) ; v2(73.44,46.88) 73.84,47.28 ; v2(73.44,46.88) 73.03,46.47 ; v2(73.44,46.88) 73.84,46.47 ; 65.44,46.38 v2(65.84,45.98) ; v2(65.84,45.98) 66.25,45.57 ; v2(65.84,45.98) 65.44,45.57 ; v2(65.84,45.98) 66.25,46.38 ; v1(61.8,88.8) 62.26,89.26 ; v1(61.8,88.8) 62.26,88.34 ; v1(61.8,88.8) 61.34,88.34 ; v1(61.8,88.8) 61.34,89.26 ; 11.79,9.78 v2(12.19,9.38) ; v2(12.19,9.38) 11.79,8.97 ; v2(12.19,9.38) 12.59,8.97 ; v2(12.19,9.38) 12.59,9.78 ; v2(8.39,11.88) 8.79,11.47 ; v2(8.39,11.88) 7.99,12.28 ; v2(8.39,11.88) 8.79,12.28 ; v2(8.39,11.88) 7.99,11.47 ; 69.69,18.61 v2(70.1,18.2) ; v2(70.1,18.2) 70.5,17.8 ; v2(70.1,18.2) 70.5,18.61 ; v2(70.1,18.2) 69.69,17.8 ; v2(64.3,34.7) 64.7,35.1 ; v2(64.3,34.7) 63.9,34.3 ; v2(64.3,34.7) 63.9,35.1 ; v2(64.3,34.7) 64.7,34.3 ; 40.14,36.14 v1(40.6,36.6) ; v1(40.6,36.6) 41.06,36.14 ; v1(40.6,36.6) 41.06,37.06 ; v1(40.6,36.6) 40.14,37.06 ; v2(24.9,62.8) 25.3,62.4 ; v2(24.9,62.8) 24.5,63.2 ; v2(24.9,62.8) 24.5,62.4 ; v2(24.9,62.8) 25.3,63.2 ; 7.99,43.98 v2(8.39,43.58) ; v2(8.39,43.58) 7.99,43.17 ; v2(8.39,43.58) 8.79,43.98 ; v2(8.39,43.58) 8.79,43.17 ; v2(74.7,73.7) 75.11,73.29 ; v2(74.7,73.7) 75.11,74.1 ; v2(74.7,73.7) 74.3,73.29 ; v2(74.7,73.7) 74.3,74.1 ; 57.1,73.82 v1(57.56,74.27) ; v1(57.56,74.27) 57.1,74.73 ; v1(57.56,74.27) 58.02,74.73 ; v1(57.56,74.27) 58.02,73.82 ; 11.84,30.57 v2(12.24,30.98) ; v2(12.24,30.98) 12.64,31.38 ; v2(12.24,30.98) 11.84,31.38 ; v2(12.24,30.98) 12.64,30.57 ; 29.34,89.26 v1(29.8,88.8) ; v1(29.8,88.8) 30.26,88.34 ; v1(29.8,88.8) 30.26,89.26 ; v1(29.8,88.8) 29.34,88.34 ; 19.8,83.89 v2(20.2,84.3) ; v2(20.2,84.3) 19.8,84.7 ; v2(20.2,84.3) 20.61,84.7 ; v2(20.2,84.3) 20.61,83.89 ; 54.66,2.38 v3(55.36,3.09) ; v3(55.36,3.09) 56.07,3.79 ; v3(55.36,3.09) 56.07,2.38 ; v3(55.36,3.09) 54.66,3.79 ; 1.52,2.12 v4(3,3.6) ; v4(3,3.6) 4.48,2.12 ; v4(3,3.6) 4.48,5.08 ; v4(3,3.6) 1.52,5.08 ; 26.18,71.52 v1(26.64,71.97) ; v1(26.64,71.97) 26.18,72.43 ; v1(26.64,71.97) 27.1,72.43 ; v1(26.64,71.97) 27.1,71.52 ; v1(1.2,12.4) 1.66,12.86 ; v1(1.2,12.4) 1.66,11.94 ; v1(1.2,12.4) 0.74,12.86 ; v1(1.2,12.4) 0.74,11.94 ; v1(25.8,88.8) 26.26,89.26 ; v1(25.8,88.8) 26.26,88.34 ; v1(25.8,88.8) 25.34,89.26 ; v1(25.8,88.8) 25.34,88.34 ; 81.52,88.48 v4(83,87) ; v4(83,87) 84.48,85.52 ; v4(83,87) 81.52,85.52 ; v4(83,87) 84.48,88.48 ; v1(30.04,36.48) 30.5,36.93 ; v1(30.04,36.48) 29.58,36.02 ; v1(30.04,36.48) 29.58,36.93 ; v1(30.04,36.48) 30.5,36.02 ; v1(47.74,38.58) 48.2,38.12 ; v1(47.74,38.58) 47.28,39.03 ; v1(47.74,38.58) 48.2,39.03 ; v1(47.74,38.58) 47.28,38.12 ; 20.99,13.11 v2(21.4,12.7) ; v2(21.4,12.7) 20.99,12.29 ; v2(21.4,12.7) 21.8,12.29 ; v2(21.4,12.7) 21.8,13.11 ; 28.39,27.11 v2(28.8,26.7) ; v2(28.8,26.7) 29.2,26.3 ; v2(28.8,26.7) 29.2,27.11 ; v2(28.8,26.7) 28.39,26.3 ; v1(49.56,74.27) 50.02,74.73 ; v1(49.56,74.27) 50.02,73.82 ; v1(49.56,74.27) 49.1,74.73 ; v1(49.56,74.27) 49.1,73.82 ; v1(84.8,60.4) 85.26,60.86 ; v1(84.8,60.4) 84.34,60.86 ; v1(84.8,60.4) 85.26,59.94 ; v1(84.8,60.4) 84.34,59.94 ; 5.5,10.9 v2(5.9,10.5) ; v2(5.9,10.5) 6.3,10.1 ; v2(5.9,10.5) 5.5,10.1 ; v2(5.9,10.5) 6.3,10.9 ; 11.79,13.58 v2(12.19,13.17) ; v2(12.19,13.17) 12.59,12.77 ; v2(12.19,13.17) 11.79,12.77 ; v2(12.19,13.17) 12.59,13.58 ; 0.74,47.94 v1(1.2,48.4) ; v1(1.2,48.4) 1.66,48.86 ; v1(1.2,48.4) 1.66,47.94 ; v1(1.2,48.4) 0.74,48.86 ; v2(8.39,20.78) 8.79,20.37 ; v2(8.39,20.78) 8.79,21.18 ; v2(8.39,20.78) 7.99,21.18 ; v2(8.39,20.78) 7.99,20.37 ; 0.74,71.94 v1(1.2,72.4) ; v1(1.2,72.4) 1.66,72.86 ; v1(1.2,72.4) 0.74,72.86 ; v1(1.2,72.4) 1.66,71.94 ; 9.54,0.74 v1(10,1.2) ; v1(10,1.2) 9.54,1.66 ; v1(10,1.2) 10.46,0.74 ; v1(10,1.2) 10.46,1.66 ; v1(1.2,20.4) 1.66,20.86 ; v1(1.2,20.4) 0.74,20.86 ; v1(1.2,20.4) 0.74,19.94 ; v1(1.2,20.4) 1.66,19.94 ; 29.58,40.02 v1(30.04,40.48) ; v1(30.04,40.48) 29.58,40.93 ; v1(30.04,40.48) 30.5,40.93 ; v1(30.04,40.48) 30.5,40.02 ; 72.14,0.74 v1(72.6,1.2) ; v1(72.6,1.2) 72.14,1.66 ; v1(72.6,1.2) 73.06,1.66 ; v1(72.6,1.2) 73.06,0.74 ; 37.54,0.74 v1(38,1.2) ; v1(38,1.2) 38.46,1.66 ; v1(38,1.2) 38.46,0.74 ; v1(38,1.2) 37.54,1.66 ; 67.23,6.57 v2(67.64,6.97) ; v2(67.64,6.97) 68.05,7.38 ; v2(67.64,6.97) 67.23,7.38 ; v2(67.64,6.97) 68.05,6.57 ; 59.44,55.08 v2(59.84,54.68) ; v2(59.84,54.68) 60.24,54.27 ; v2(59.84,54.68) 60.24,55.08 ; v2(59.84,54.68) 59.44,54.27 ; v5(6.64,7.54) 7.45,6.72 ; v5(6.64,7.54) 5.83,8.35 ; v5(6.64,7.54) 5.83,6.72 ; v5(6.64,7.54) 7.45,8.35 ; v1(22.64,71.97) 23.1,71.52 ; v1(22.64,71.97) 22.18,71.52 ; v1(22.64,71.97) 23.1,72.43 ; v1(22.64,71.97) 22.18,72.43 ; 60.15,1.18 v2(59.74,0.77) 59.34,1.18 ; 43.18,38.12 v1(43.64,38.58) ; v1(43.64,38.58) 44.1,38.12 ; v1(43.64,38.58) 43.18,39.03 ; v1(43.64,38.58) 44.1,39.03 ; 6.74,24.98 v2(7.14,24.58) ; v2(7.14,24.58) 7.54,24.98 ; v2(7.14,24.58) 6.74,24.17 ; v2(7.14,24.58) 7.54,24.17 ; v2(12.19,18.28) 12.59,18.68 ; v2(12.19,18.28) 11.79,18.68 ; v2(12.19,18.28) 12.59,17.87 ; v2(12.19,18.28) 11.79,17.87 ; v1(50.04,39.08) 50.5,39.53 ; v1(50.04,39.08) 49.58,38.62 ; v1(50.04,39.08) 49.58,39.53 ; v1(50.04,39.08) 50.5,38.62 ; v2(46.6,32.2) 47.01,31.8 ; v2(46.6,32.2) 47.01,32.6 ; v2(46.6,32.2) 46.2,31.8 ; v2(46.6,32.2) 46.2,32.6 ; 9.88,76.88 F2.2 ; F2.2 10.91,75.85 ; F2.2 11.94,76.88 ; F2.2 10.91,77.9 ; 6.69,45.28 v2(7.09,44.88) ; v2(7.09,44.88) 7.5,45.28 ; v2(7.09,44.88) 6.69,44.47 ; v2(7.09,44.88) 7.5,44.47 ; 62.65,1.18 v2(62.24,0.77) 61.84,1.18 ; v1(1.2,28.4) 1.66,27.94 ; v1(1.2,28.4) 1.66,28.86 ; v1(1.2,28.4) 0.74,27.94 ; v1(1.2,28.4) 0.74,28.86 ; v2(12.19,48.68) 12.59,48.27 ; v2(12.19,48.68) 12.59,49.08 ; v2(12.19,48.68) 11.79,49.08 ; v2(12.19,48.68) 11.79,48.27 ; v2(7.1,49.9) 7.5,50.3 ; v2(7.1,49.9) 6.7,50.3 ; v2(7.1,49.9) 7.5,49.5 ; v2(7.1,49.9) 6.7,49.5 ; 60.94,1.18 v2(61.34,0.77) 61.74,1.18 ; 8.88,61.1 v5(9.69,61.92) ; v5(9.69,61.92) 8.88,62.73 ; v5(9.69,61.92) 10.5,61.1 ; v5(9.69,61.92) 10.5,62.73
  L5-GND w0.275: v1(1.2,48.4) 1.66,47.94 ; v1(1.2,48.4) 0.74,47.94 ; v1(1.2,48.4) 1.66,48.86 ; v1(1.2,48.4) 0.74,48.86 ; 28.58,37.02 v1(29.04,37.48) ; v1(29.04,37.48) 29.5,37.02 ; v1(29.04,37.48) 29.5,37.93 ; v1(29.04,37.48) 28.58,37.93 ; 41.34,88.34 v1(41.8,88.8) ; v1(41.8,88.8) 42.26,89.26 ; v1(41.8,88.8) 42.26,88.34 ; v1(41.8,88.8) 41.34,89.26 ; 5.44,30.08 v2(5.84,29.68) ; v2(5.84,29.68) 6.25,29.27 ; v2(5.84,29.68) 5.44,29.27 ; v2(5.84,29.68) 6.25,30.08 ; v2(64.2,42.1) 64.6,41.7 ; v2(64.2,42.1) 63.8,41.7 ; v2(64.2,42.1) 63.8,42.51 ; v2(64.2,42.1) 64.6,42.51 ; v2(60.4,29) 60.8,29.41 ; v2(60.4,29) 59.99,29.41 ; v2(60.4,29) 59.99,28.6 ; v2(60.4,29) 60.8,28.6 ; v1(1.2,8.4) 1.66,8.86 ; v1(1.2,8.4) 0.74,8.86 ; v1(1.2,8.4) 0.74,7.94 ; v1(1.2,8.4) 1.66,7.94 ; 73.3,34.09 v2(73.7,34.5) ; v2(73.7,34.5) 74.11,34.91 ; v2(73.7,34.5) 73.3,34.91 ; v2(73.7,34.5) 74.11,34.09 ; v2(7.14,28.38) 7.54,27.97 ; v2(7.14,28.38) 7.54,28.78 ; v2(7.14,28.38) 6.74,27.97 ; v2(7.14,28.38) 6.74,28.78 ; v1(84.8,76.4) 85.26,75.94 ; v1(84.8,76.4) 84.34,75.94 ; v1(84.8,76.4) 85.26,76.86 ; v1(84.8,76.4) 84.34,76.86 ; v2(13.49,57.58) 13.89,57.98 ; v2(13.49,57.58) 13.89,57.17 ; v2(13.49,57.58) 13.09,57.17 ; v2(13.49,57.58) 13.09,57.98 ; v1(84.8,64.4) 85.26,64.86 ; v1(84.8,64.4) 84.34,63.94 ; v1(84.8,64.4) 85.26,63.94 ; v1(84.8,64.4) 84.34,64.86 ; 84.34,80.86 v1(84.8,80.4) ; v1(84.8,80.4) 85.26,80.86 ; v1(84.8,80.4) 85.26,79.94 ; v1(84.8,80.4) 84.34,79.94 ; 7.99,11.47 v2(8.39,11.88) ; v2(8.39,11.88) 8.79,12.28 ; v2(8.39,11.88) 8.79,11.47 ; v2(8.39,11.88) 7.99,12.28 ; 61.1,73.82 v1(61.56,74.27) ; v1(61.56,74.27) 62.02,73.82 ; v1(61.56,74.27) 61.1,74.73 ; v1(61.56,74.27) 62.02,74.73 ; 11.79,9.78 v2(12.19,9.38) ; v2(12.19,9.38) 12.59,9.78 ; v2(12.19,9.38) 11.79,8.97 ; v2(12.19,9.38) 12.59,8.97 ; v2(10.74,37.88) 11.14,38.28 ; v2(10.74,37.88) 10.34,37.47 ; v2(10.74,37.88) 11.14,37.47 ; v2(10.74,37.88) 10.34,38.28 ; v2(69.34,48.48) 69.75,48.88 ; v2(69.34,48.48) 69.75,48.07 ; v2(69.34,48.48) 68.94,48.07 ; v2(69.34,48.48) 68.94,48.88 ; v1(1.2,44.4) 1.66,43.94 ; v1(1.2,44.4) 0.74,44.86 ; v1(1.2,44.4) 0.74,43.94 ; v1(1.2,44.4) 1.66,44.86 ; v1(24.94,82.47) 25.4,82.93 ; v1(24.94,82.47) 24.48,82.93 ; v1(24.94,82.47) 25.4,82.02 ; v1(24.94,82.47) 24.48,82.02 ; v1(26.64,71.97) 27.1,72.43 ; v1(26.64,71.97) 26.18,72.43 ; v1(26.64,71.97) 26.18,71.52 ; v1(26.64,71.97) 27.1,71.52 ; v2(5.84,24.58) 6.25,24.17 ; v2(5.84,24.58) 6.25,24.98 ; v2(5.84,24.58) 5.44,24.98 ; v2(5.84,24.58) 5.44,24.17 ; 13.13,43.98 v2(13.54,43.58) ; v2(13.54,43.58) 13.95,43.98 ; v2(13.54,43.58) 13.95,43.17 ; v2(13.54,43.58) 13.13,43.17 ; v1(49.56,74.27) 50.02,74.73 ; v1(49.56,74.27) 49.1,73.82 ; v1(49.56,74.27) 49.1,74.73 ; v1(49.56,74.27) 50.02,73.82 ; 28.58,39.93 v1(29.04,39.48) ; v1(29.04,39.48) 28.58,39.02 ; v1(29.04,39.48) 29.5,39.93 ; v1(29.04,39.48) 29.5,39.02 ; 67.23,51.77 v2(67.64,52.18) ; v2(67.64,52.18) 68.05,51.77 ; v2(67.64,52.18) 68.05,52.58 ; v2(67.64,52.18) 67.23,52.58 ; v2(73.44,46.88) 73.84,46.47 ; v2(73.44,46.88) 73.84,47.28 ; v2(73.44,46.88) 73.03,46.47 ; v2(73.44,46.88) 73.03,47.28 ; 25.8,19.21 v2(26.2,18.8) ; v2(26.2,18.8) 26.61,18.39 ; v2(26.2,18.8) 25.8,18.39 ; v2(26.2,18.8) 26.61,19.21 ; v1(61.8,88.8) 62.26,88.34 ; v1(61.8,88.8) 61.34,88.34 ; v1(61.8,88.8) 62.26,89.26 ; v1(61.8,88.8) 61.34,89.26 ; v1(30.04,38.48) 30.5,38.02 ; v1(30.04,38.48) 30.5,38.93 ; v1(30.04,38.48) 29.58,38.93 ; v1(30.04,38.48) 29.58,38.02 ; 17.34,88.34 v1(17.8,88.8) ; v1(17.8,88.8) 18.26,89.26 ; v1(17.8,88.8) 17.34,89.26 ; v1(17.8,88.8) 18.26,88.34 ; v1(41.14,75.47) 41.6,75.02 ; v1(41.14,75.47) 41.6,75.93 ; v1(41.14,75.47) 40.68,75.93 ; v1(41.14,75.47) 40.68,75.02 ; 7.99,55.48 v2(8.39,55.08) ; v2(8.39,55.08) 7.99,54.67 ; v2(8.39,55.08) 8.79,54.67 ; v2(8.39,55.08) 8.79,55.48 ; 6.69,43.98 v2(7.09,43.58) ; v2(7.09,43.58) 6.69,43.17 ; v2(7.09,43.58) 7.5,43.98 ; v2(7.09,43.58) 7.5,43.17 ; 57.1,73.82 v1(57.56,74.27) ; v1(57.56,74.27) 58.02,73.82 ; v1(57.56,74.27) 57.1,74.73 ; v1(57.56,74.27) 58.02,74.73 ; 5.44,38.17 v2(5.84,38.58) ; v2(5.84,38.58) 6.25,38.17 ; v2(5.84,38.58) 5.44,38.98 ; v2(5.84,38.58) 6.25,38.98 ; 29.58,36.02 v1(30.04,36.48) ; v1(30.04,36.48) 30.5,36.93 ; v1(30.04,36.48) 29.58,36.93 ; v1(30.04,36.48) 30.5,36.02 ; v2(7.09,29.68) 7.5,29.27 ; v2(7.09,29.68) 7.5,30.08 ; v2(7.09,29.68) 6.69,30.08 ; v2(7.09,29.68) 6.69,29.27 ; 24.18,71.52 v1(24.64,71.97) ; v1(24.64,71.97) 25.1,71.52 ; v1(24.64,71.97) 25.1,72.43 ; v1(24.64,71.97) 24.18,72.43 ; v2(46.6,32.2) 47.01,32.6 ; v2(46.6,32.2) 46.2,31.8 ; v2(46.6,32.2) 47.01,31.8 ; v2(46.6,32.2) 46.2,32.6 ; 69.5,26.1 v2(69.9,26.5) ; v2(69.9,26.5) 70.31,26.91 ; v2(69.9,26.5) 69.5,26.91 ; v2(69.9,26.5) 70.31,26.1 ; v2(13.49,53.77) 13.89,53.37 ; v2(13.49,53.77) 13.09,54.18 ; v2(13.49,53.77) 13.89,54.18 ; v2(13.49,53.77) 13.09,53.37 ; 13.34,89.26 v1(13.8,88.8) ; v1(13.8,88.8) 14.26,89.26 ; v1(13.8,88.8) 14.26,88.34 ; v1(13.8,88.8) 13.34,88.34 ; 0.74,11.94 v1(1.2,12.4) ; v1(1.2,12.4) 0.74,12.86 ; v1(1.2,12.4) 1.66,11.94 ; v1(1.2,12.4) 1.66,12.86 ; 6.7,50.8 v2(7.1,51.2) ; v2(7.1,51.2) 7.5,51.61 ; v2(7.1,51.2) 6.7,51.61 ; v2(7.1,51.2) 7.5,50.8 ; 13.09,38.17 v2(13.49,38.58) ; v2(13.49,38.58) 13.09,38.98 ; v2(13.49,38.58) 13.89,38.98 ; v2(13.49,38.58) 13.89,38.17 ; 41.44,52.37 v2(41.84,52.77) ; v2(41.84,52.77) 42.24,52.37 ; v2(41.84,52.77) 42.24,53.18 ; v2(41.84,52.77) 41.44,53.18 ; 10.23,22.38 v2(10.64,21.98) ; v2(10.64,21.98) 11.04,22.38 ; v2(10.64,21.98) 11.04,21.57 ; v2(10.64,21.98) 10.23,21.57 ; v2(62.44,6.97) 62.84,6.57 ; v2(62.44,6.97) 62.03,7.38 ; v2(62.44,6.97) 62.03,6.57 ; v2(62.44,6.97) 62.84,7.38 ; v1(18.64,71.97) 19.1,72.43 ; v1(18.64,71.97) 19.1,71.52 ; v1(18.64,71.97) 18.18,71.52 ; v1(18.64,71.97) 18.18,72.43 ; v2(13.49,23.28) 13.89,22.87 ; v2(13.49,23.28) 13.09,22.87 ; v2(13.49,23.28) 13.09,23.68 ; v2(13.49,23.28) 13.89,23.68 ; 58.24,32.64 v1(58.7,33.1) ; v1(58.7,33.1) 58.24,33.56 ; v1(58.7,33.1) 59.16,33.56 ; v1(58.7,33.1) 59.16,32.64 ; 84.34,40.86 v1(84.8,40.4) ; v1(84.8,40.4) 85.26,39.94 ; v1(84.8,40.4) 84.34,39.94 ; v1(84.8,40.4) 85.26,40.86 ; 19.49,24.21 v2(19.9,23.8) ; v2(19.9,23.8) 20.3,23.4 ; v2(19.9,23.8) 20.3,24.21 ; v2(19.9,23.8) 19.49,23.4 ; v1(45.8,88.8) 46.26,88.34 ; v1(45.8,88.8) 45.34,89.26 ; v1(45.8,88.8) 45.34,88.34 ; v1(45.8,88.8) 46.26,89.26 ; 37.54,1.66 v1(38,1.2) ; v1(38,1.2) 38.46,1.66 ; v1(38,1.2) 38.46,0.74 ; v1(38,1.2) 37.54,0.74 ; 50.68,37.62 v1(51.14,38.08) ; v1(51.14,38.08) 50.68,38.53 ; v1(51.14,38.08) 51.6,38.53 ; v1(51.14,38.08) 51.6,37.62 ; v1(54,1.2) 54.46,0.74 ; v1(54,1.2) 54.46,1.66 ; v1(54,1.2) 53.54,1.66 ; v1(54,1.2) 53.54,0.74 ; 10.54,14.88 v2(10.94,14.47) ; v2(10.94,14.47) 10.54,14.07 ; v2(10.94,14.47) 11.35,14.88 ; v2(10.94,14.47) 11.35,14.07 ; v2(59.84,54.68) 60.24,54.27 ; v2(59.84,54.68) 60.24,55.08 ; v2(59.84,54.68) 59.44,55.08 ; v2(59.84,54.68) 59.44,54.27 ; 7.99,11.08 v2(8.39,10.68) ; v2(8.39,10.68) 8.79,10.27 ; v2(8.39,10.68) 8.79,11.08 ; v2(8.39,10.68) 7.99,10.27 ; v1(1.2,16.4) 1.66,15.94 ; v1(1.2,16.4) 1.66,16.86 ; v1(1.2,16.4) 0.74,16.86 ; v1(1.2,16.4) 0.74,15.94 ; v1(33.8,88.8) 34.26,89.26 ; v1(33.8,88.8) 33.34,88.34 ; v1(33.8,88.8) 34.26,88.34 ; v1(33.8,88.8) 33.34,89.26 ; 5.44,18.68 v2(5.84,18.28) ; v2(5.84,18.28) 5.44,17.87 ; v2(5.84,18.28) 6.25,17.87 ; v2(5.84,18.28) 6.25,18.68 ; 45.54,0.74 v1(46,1.2) ; v1(46,1.2) 45.54,1.66 ; v1(46,1.2) 46.46,1.66 ; v1(46,1.2) 46.46,0.74 ; v2(28.8,26.7) 29.2,27.11 ; v2(28.8,26.7) 29.2,26.3 ; v2(28.8,26.7) 28.39,26.3 ; v2(28.8,26.7) 28.39,27.11 ; 28.58,35.02 v1(29.04,35.48) ; v1(29.04,35.48) 28.58,35.93 ; v1(29.04,35.48) 29.5,35.02 ; v1(29.04,35.48) 29.5,35.93 ; 11.79,12.77 v2(12.19,13.17) ; v2(12.19,13.17) 12.59,12.77 ; v2(12.19,13.17) 12.59,13.58 ; v2(12.19,13.17) 11.79,13.58 ; 11.79,52.07 v2(12.19,52.48) ; v2(12.19,52.48) 12.59,52.07 ; v2(12.19,52.48) 12.59,52.88 ; v2(12.19,52.48) 11.79,52.88 ; v2(70.1,18.2) 70.5,17.8 ; v2(70.1,18.2) 70.5,18.61 ; v2(70.1,18.2) 69.69,17.8 ; v2(70.1,18.2) 69.69,18.61 ; v1(72.6,1.2) 73.06,1.66 ; v1(72.6,1.2) 73.06,0.74 ; v1(72.6,1.2) 72.14,0.74 ; v1(72.6,1.2) 72.14,1.66 ; v1(35.56,74.27) 36.02,73.82 ; v1(35.56,74.27) 35.1,74.73 ; v1(35.56,74.27) 36.02,74.73 ; v1(35.56,74.27) 35.1,73.82 ; 0.74,55.94 v1(1.2,56.4) ; v1(1.2,56.4) 1.66,55.94 ; v1(1.2,56.4) 1.66,56.86 ; v1(1.2,56.4) 0.74,56.86 ; v2(13.49,49.98) 13.89,50.38 ; v2(13.49,49.98) 13.09,49.57 ; v2(13.49,49.98) 13.09,50.38 ; v2(13.49,49.98) 13.89,49.57 ; v2(47.1,78.3) 47.51,78.7 ; v2(47.1,78.3) 47.51,77.89 ; v2(47.1,78.3) 46.7,77.89 ; v2(47.1,78.3) 46.7,78.7 ; 73.34,88.34 v1(73.8,88.8) ; v1(73.8,88.8) 74.26,89.26 ; v1(73.8,88.8) 73.34,89.26 ; v1(73.8,88.8) 74.26,88.34 ; 63.1,74.73 v1(63.56,74.27) ; v1(63.56,74.27) 63.1,73.82 ; v1(63.56,74.27) 64.02,74.73 ; v1(63.56,74.27) 64.02,73.82 ; 11.79,40.67 v2(12.19,41.08) ; v2(12.19,41.08) 12.59,40.67 ; v2(12.19,41.08) 11.79,41.48 ; v2(12.19,41.08) 12.59,41.48 ; v1(1.2,72.4) 1.66,71.94 ; v1(1.2,72.4) 1.66,72.86 ; v1(1.2,72.4) 0.74,72.86 ; v1(1.2,72.4) 0.74,71.94 ; 69.84,6.57 v2(70.24,6.97) ; v2(70.24,6.97) 70.65,6.57 ; v2(70.24,6.97) 70.65,7.38 ; v2(70.24,6.97) 69.84,7.38 ; v2(12.19,58.88) 12.59,59.28 ; v2(12.19,58.88) 11.79,58.47 ; v2(12.19,58.88) 11.79,59.28 ; v2(12.19,58.88) 12.59,58.47 ; 84.34,67.94 v1(84.8,68.4) ; v1(84.8,68.4) 85.26,68.86 ; v1(84.8,68.4) 85.26,67.94 ; v1(84.8,68.4) 84.34,68.86 ; v1(22.64,71.97) 23.1,72.43 ; v1(22.64,71.97) 22.18,72.43 ; v1(22.64,71.97) 23.1,71.52 ; v1(22.64,71.97) 22.18,71.52 ; 28.58,41.93 v1(29.04,41.48) ; v1(29.04,41.48) 29.5,41.93 ; v1(29.04,41.48) 29.5,41.02 ; v1(29.04,41.48) 28.58,41.02 ; v1(34,1.2) 34.46,0.74 ; v1(34,1.2) 34.46,1.66 ; v1(34,1.2) 33.54,1.66 ; v1(34,1.2) 33.54,0.74 ; 84.34,60.86 v1(84.8,60.4) ; v1(84.8,60.4) 85.26,59.94 ; v1(84.8,60.4) 84.34,59.94 ; v1(84.8,60.4) 85.26,60.86 ; v2(8.39,35.98) 8.79,36.38 ; v2(8.39,35.98) 7.99,35.57 ; v2(8.39,35.98) 8.79,35.57 ; v2(8.39,35.98) 7.99,36.38 ; v1(21.8,88.8) 22.26,88.34 ; v1(21.8,88.8) 21.34,88.34 ; v1(21.8,88.8) 21.34,89.26 ; v1(21.8,88.8) 22.26,89.26 ; v1(84.8,12.4) 85.26,12.86 ; v1(84.8,12.4) 84.34,12.86 ; v1(84.8,12.4) 84.34,11.94 ; v1(84.8,12.4) 85.26,11.94 ; v1(51.56,74.27) 52.02,74.73 ; v1(51.56,74.27) 51.1,74.73 ; v1(51.56,74.27) 52.02,73.82 ; v1(51.56,74.27) 51.1,73.82 ; v1(84.8,72.4) 85.26,72.86 ; v1(84.8,72.4) 84.34,72.86 ; v1(84.8,72.4) 85.26,71.94 ; v1(84.8,72.4) 84.34,71.94 ; v2(5.9,10.5) 6.3,10.1 ; v2(5.9,10.5) 5.5,10.1 ; v2(5.9,10.5) 6.3,10.9 ; v2(5.9,10.5) 5.5,10.9 ; v1(1.2,52.4) 1.66,51.94 ; v1(1.2,52.4) 0.74,51.94 ; v1(1.2,52.4) 0.74,52.86 ; v1(1.2,52.4) 1.66,52.86 ; v1(51.14,40.08) 51.6,39.62 ; v1(51.14,40.08) 50.68,39.62 ; v1(51.14,40.08) 50.68,40.53 ; v1(51.14,40.08) 51.6,40.53 ; v1(10,1.2) 10.46,1.66 ; v1(10,1.2) 9.54,1.66 ; v1(10,1.2) 9.54,0.74 ; v1(10,1.2) 10.46,0.74 ; 64.44,55.08 v2(64.84,54.68) ; v2(64.84,54.68) 65.25,55.08 ; v2(64.84,54.68) 64.44,54.27 ; v2(64.84,54.68) 65.25,54.27 ; 10.91,75.85 F2.2 ; F2.2 9.88,76.88 ; F2.2 10.91,77.9 ; F2.2 11.94,76.88 ; 0.74,23.94 v1(1.2,24.4) ; v1(1.2,24.4) 0.74,24.86 ; v1(1.2,24.4) 1.66,24.86 ; v1(1.2,24.4) 1.66,23.94 ; 84.34,43.94 v1(84.8,44.4) ; v1(84.8,44.4) 85.26,43.94 ; v1(84.8,44.4) 85.26,44.86 ; v1(84.8,44.4) 84.34,44.86 ; v2(11.04,27.08) 11.45,27.48 ; v2(11.04,27.08) 10.63,27.48 ; v2(11.04,27.08) 11.45,26.67 ; v2(11.04,27.08) 10.63,26.67 ; 84.34,23.94 v1(84.8,24.4) ; v1(84.8,24.4) 85.26,24.86 ; v1(84.8,24.4) 85.26,23.94 ; v1(84.8,24.4) 84.34,24.86 ; v2(12.24,34.77) 12.64,34.37 ; v2(12.24,34.77) 11.84,34.37 ; v2(12.24,34.77) 12.64,35.18 ; v2(12.24,34.77) 11.84,35.18 ; 13.43,19.67 v2(13.84,20.08) ; v2(13.84,20.08) 13.43,20.48 ; v2(13.84,20.08) 14.25,19.67 ; v2(13.84,20.08) 14.25,20.48 ; 11.84,45.77 v2(12.24,46.18) ; v2(12.24,46.18) 11.84,46.58 ; v2(12.24,46.18) 12.64,45.77 ; v2(12.24,46.18) 12.64,46.58 ; 5.54,0.74 v1(6,1.2) ; v1(6,1.2) 6.46,0.74 ; v1(6,1.2) 6.46,1.66 ; v1(6,1.2) 5.54,1.66 ; 48.58,39.53 v1(49.04,39.08) ; v1(49.04,39.08) 48.58,38.62 ; v1(49.04,39.08) 49.5,39.53 ; v1(49.04,39.08) 49.5,38.62 ; v2(34.1,22.9) 34.5,22.5 ; v2(34.1,22.9) 33.7,23.3 ; v2(34.1,22.9) 33.7,22.5 ; v2(34.1,22.9) 34.5,23.3 ; v2(8.39,57.58) 8.79,57.98 ; v2(8.39,57.58) 7.99,57.98 ; v2(8.39,57.58) 7.99,57.17 ; v2(8.39,57.58) 8.79,57.17 ; 79.34,0.74 v1(79.8,1.2) ; v1(79.8,1.2) 80.26,1.66 ; v1(79.8,1.2) 79.34,1.66 ; v1(79.8,1.2) 80.26,0.74 ; v2(64.84,45.98) 65.25,45.57 ; v2(64.84,45.98) 65.25,46.38 ; v2(64.84,45.98) 64.44,45.57 ; v2(64.84,45.98) 64.44,46.38 ; 75.34,1.66 v1(75.8,1.2) ; v1(75.8,1.2) 76.26,0.74 ; v1(75.8,1.2) 76.26,1.66 ; v1(75.8,1.2) 75.34,0.74 ; 24.5,62.4 v2(24.9,62.8) ; v2(24.9,62.8) 25.3,62.4 ; v2(24.9,62.8) 25.3,63.2 ; v2(24.9,62.8) 24.5,63.2 ; 84.34,31.94 v1(84.8,32.4) ; v1(84.8,32.4) 84.34,32.86 ; v1(84.8,32.4) 85.26,32.86 ; v1(84.8,32.4) 85.26,31.94 ; 37.03,48.78 v2(37.44,48.38) ; v2(37.44,48.38) 37.84,48.78 ; v2(37.44,48.38) 37.03,47.97 ; v2(37.44,48.38) 37.84,47.97 ; 40.14,40.14 v1(40.6,40.6) ; v1(40.6,40.6) 40.14,41.06 ; v1(40.6,40.6) 41.06,41.06 ; v1(40.6,40.6) 41.06,40.14 ; 37.03,51.17 v2(37.44,51.58) ; v2(37.44,51.58) 37.84,51.17 ; v2(37.44,51.58) 37.03,51.98 ; v2(37.44,51.58) 37.84,51.98 ; 61.74,1.18 v2(61.34,0.77) 60.94,1.18 ; 72.83,51.47 v2(73.24,51.88) ; v2(73.24,51.88) 73.64,52.28 ; v2(73.24,51.88) 73.64,51.47 ; 84.34,47.94 v1(84.8,48.4) ; v1(84.8,48.4) 85.26,47.94 ; v1(84.8,48.4) 84.34,48.86 ; v1(84.8,48.4) 85.26,48.86 ; 6.69,45.28 v2(7.09,44.88) ; v2(7.09,44.88) 7.5,44.47 ; v2(7.09,44.88) 6.69,44.47 ; v2(7.09,44.88) 7.5,45.28 ; 73.13,49 v3(73.84,48.3) ; v3(73.84,48.3) 73.13,47.59 ; v3(73.84,48.3) 74.54,49 ; v3(73.84,48.3) 74.54,47.59 ; 6.69,13.58 v2(7.09,13.17) ; v2(7.09,13.17) 7.5,12.77 ; v2(7.09,13.17) 7.5,13.58 ; v2(7.09,13.17) 6.69,12.77 ; v2(69.8,54.7) 70.2,54.3 ; v2(69.8,54.7) 69.4,55.11 ; v2(69.8,54.7) 70.2,55.11 ; v2(69.8,54.7) 69.4,54.3 ; 0.74,60.86 v1(1.2,60.4) ; v1(1.2,60.4) 0.74,59.94 ; v1(1.2,60.4) 1.66,59.94 ; v1(1.2,60.4) 1.66,60.86 ; 81.52,85.52 v4(83,87) ; v4(83,87) 81.52,88.48 ; v4(83,87) 84.48,88.48 ; v4(83,87) 84.48,85.52 ; 63.9,34.3 v2(64.3,34.7) ; v2(64.3,34.7) 64.7,34.3 ; v2(64.3,34.7) 63.9,35.1 ; v2(64.3,34.7) 64.7,35.1 ; 51.09,22.9 v2(51.5,23.3) ; v2(51.5,23.3) 51.09,23.71 ; v2(51.5,23.3) 51.91,22.9 ; v2(51.5,23.3) 51.91,23.71 ; v1(1.2,68.4) 1.66,67.94 ; v1(1.2,68.4) 0.74,68.86 ; v1(1.2,68.4) 1.66,68.86 ; v1(1.2,68.4) 0.74,67.94 ; 6.69,33.07 v2(7.09,33.48) ; v2(7.09,33.48) 7.5,33.88 ; v2(7.09,33.48) 7.5,33.07 ; v2(7.09,33.48) 6.69,33.88 ; 56.23,7.78 v2(56.64,7.38) ; v2(56.64,7.38) 57.05,6.97 ; v2(56.64,7.38) 57.05,7.78 ; v2(56.64,7.38) 56.23,6.97 ; 57.3,77.49 v2(57.7,77.9) ; v2(57.7,77.9) 58.1,77.49 ; v2(57.7,77.9) 57.3,78.3 ; v2(57.7,77.9) 58.1,78.3 ; 71,50.3 v2(71.4,49.9) ; v2(71.4,49.9) 71,49.5 ; v2(71.4,49.9) 71.81,49.5 ; v2(71.4,49.9) 71.81,50.3 ; 49.54,0.74 v1(50,1.2) ; v1(50,1.2) 50.46,0.74 ; v1(50,1.2) 50.46,1.66 ; v1(50,1.2) 49.54,1.66 ; v1(84.8,16.4) 85.26,16.86 ; v1(84.8,16.4) 84.34,16.86 ; v1(84.8,16.4) 85.26,15.94 ; v1(84.8,16.4) 84.34,15.94 ; 16.8,66.2 v2(17.2,65.8) ; v2(17.2,65.8) 16.8,65.39 ; v2(17.2,65.8) 17.61,66.2 ; v2(17.2,65.8) 17.61,65.39 ; 0.74,63.94 v1(1.2,64.4) ; v1(1.2,64.4) 0.74,64.86 ; v1(1.2,64.4) 1.66,64.86 ; v1(1.2,64.4) 1.66,63.94 ; v2(69.3,52.2) 69.7,51.8 ; v2(69.3,52.2) 69.7,52.61 ; v2(69.3,52.2) 68.9,51.8 ; v2(69.3,52.2) 68.9,52.61 ; v2(62.34,45.98) 62.74,45.57 ; v2(62.34,45.98) 61.94,45.57 ; v2(62.34,45.98) 62.74,46.38 ; v2(62.34,45.98) 61.94,46.38 ; v2(74.7,73.7) 75.11,73.29 ; v2(74.7,73.7) 75.11,74.1 ; v2(74.7,73.7) 74.3,73.29 ; v2(74.7,73.7) 74.3,74.1 ; 7.93,39.47 v2(8.34,39.88) ; v2(8.34,39.88) 7.93,40.28 ; v2(8.34,39.88) 8.74,39.47 ; v2(8.34,39.88) 8.74,40.28 ; 5.44,19.88 v2(5.84,19.48) ; v2(5.84,19.48) 5.44,19.07 ; v2(5.84,19.48) 6.25,19.88 ; v2(5.84,19.48) 6.25,19.07 ; v2(7.09,34.77) 7.5,35.18 ; v2(7.09,34.77) 7.5,34.37 ; v2(7.09,34.77) 6.69,34.37 ; v2(7.09,34.77) 6.69,35.18 ; v2(64.64,6.97) 65.05,6.57 ; v2(64.64,6.97) 64.23,6.57 ; v2(64.64,6.97) 65.05,7.38 ; v2(64.64,6.97) 64.23,7.38 ; v2(38.4,31.6) 38.8,32.01 ; v2(38.4,31.6) 38.8,31.2 ; v2(38.4,31.6) 38,32.01 ; v2(38.4,31.6) 38,31.2 ; v2(49,16.3) 49.41,16.71 ; v2(49,16.3) 49.41,15.89 ; v2(49,16.3) 48.59,16.71 ; v2(49,16.3) 48.59,15.89 ; 11.84,10.17 v2(12.24,10.57) ; v2(12.24,10.57) 12.64,10.98 ; v2(12.24,10.57) 11.84,10.98 ; v2(12.24,10.57) 12.64,10.17 ; 32.3,67.73 v1(32.76,67.27) ; v1(32.76,67.27) 32.3,66.82 ; v1(32.76,67.27) 33.22,67.73 ; v1(32.76,67.27) 33.22,66.82 ; 8.88,62.73 v5(9.69,61.92) ; v5(9.69,61.92) 8.88,61.1 ; v5(9.69,61.92) 10.5,61.1 ; v5(9.69,61.92) 10.5,62.73 ; 84.34,27.94 v1(84.8,28.4) ; v1(84.8,28.4) 85.26,27.94 ; v1(84.8,28.4) 85.26,28.86 ; v1(84.8,28.4) 84.34,28.86 ; 62.65,1.18 v2(62.24,0.77) 61.84,1.18 ; 7.99,43.17 v2(8.39,43.58) ; v2(8.39,43.58) 7.99,43.98 ; v2(8.39,43.58) 8.79,43.17 ; v2(8.39,43.58) 8.79,43.98 ; 5.83,8.35 v5(6.64,7.54) ; v5(6.64,7.54) 5.83,6.72 ; v5(6.64,7.54) 7.45,8.35 ; v5(6.64,7.54) 7.45,6.72 ; v1(1.2,40.4) 1.66,39.94 ; v1(1.2,40.4) 1.66,40.86 ; v1(1.2,40.4) 0.74,40.86 ; v1(1.2,40.4) 0.74,39.94 ; 22.3,41.7 v2(22.7,41.3) ; v2(22.7,41.3) 22.3,40.9 ; v2(22.7,41.3) 23.11,40.9 ; v2(22.7,41.3) 23.11,41.7 ; 79.44,88.34 v1(79.9,88.8) ; v1(79.9,88.8) 80.36,88.34 ; v1(79.9,88.8) 80.36,89.26 ; v1(79.9,88.8) 79.44,89.26 ; 73.3,42 v2(73.7,42.4) ; v2(73.7,42.4) 74.11,42 ; v2(73.7,42.4) 74.11,42.8 ; v2(73.7,42.4) 73.3,42.8 ; 0.74,28.86 v1(1.2,28.4) ; v1(1.2,28.4) 1.66,28.86 ; v1(1.2,28.4) 0.74,27.94 ; v1(1.2,28.4) 1.66,27.94 ; 6.74,24.98 v2(7.14,24.58) ; v2(7.14,24.58) 7.54,24.17 ; v2(7.14,24.58) 6.74,24.17 ; v2(7.14,24.58) 7.54,24.98 ; v1(35.14,83.57) 35.6,83.12 ; v1(35.14,83.57) 34.68,84.03 ; v1(35.14,83.57) 34.68,83.12 ; v1(35.14,83.57) 35.6,84.03 ; 7.99,15.27 v2(8.39,15.67) ; v2(8.39,15.67) 8.79,15.27 ; v2(8.39,15.67) 7.99,16.08 ; v2(8.39,15.67) 8.79,16.08 ; 28.3,6.71 v2(28.7,6.3) ; v2(28.7,6.3) 29.11,5.89 ; v2(28.7,6.3) 29.11,6.71 ; v2(28.7,6.3) 28.3,5.89 ; F1.2 3.9,76.88 ; F1.2 2.87,77.9 ; F1.2 1.84,76.88 ; F1.2 2.87,75.85 ; v1(29.8,88.8) 30.26,88.34 ; v1(29.8,88.8) 29.34,88.34 ; v1(29.8,88.8) 30.26,89.26 ; v1(29.8,88.8) 29.34,89.26 ; 29.54,0.74 v1(30,1.2) ; v1(30,1.2) 29.54,1.66 ; v1(30,1.2) 30.46,0.74 ; v1(30,1.2) 30.46,1.66 ; v1(84.8,8.4) 85.26,8.86 ; v1(84.8,8.4) 84.34,8.86 ; v1(84.8,8.4) 84.34,7.94 ; v1(84.8,8.4) 85.26,7.94 ; 0.74,84.86 v1(1.2,84.4) ; v1(1.2,84.4) 1.66,83.94 ; v1(1.2,84.4) 1.66,84.86 ; v1(1.2,84.4) 0.74,83.94 ; 12.89,83.89 v2(13.3,84.3) ; v2(13.3,84.3) 13.71,84.7 ; v2(13.3,84.3) 13.71,83.89 ; v2(13.3,84.3) 12.89,84.7 ; v1(18,1.2) 18.46,1.66 ; v1(18,1.2) 17.54,0.74 ; v1(18,1.2) 18.46,0.74 ; v1(18,1.2) 17.54,1.66 ; v2(10.94,34.77) 11.35,34.37 ; v2(10.94,34.77) 10.54,34.37 ; v2(10.94,34.77) 11.35,35.18 ; v2(10.94,34.77) 10.54,35.18 ; 59.13,9.88 v2(59.54,9.47) ; v2(59.54,9.47) 59.95,9.88 ; v2(59.54,9.47) 59.13,9.07 ; v2(59.54,9.47) 59.95,9.07 ; 1.52,5.08 v4(3,3.6) ; v4(3,3.6) 4.48,5.08 ; v4(3,3.6) 4.48,2.12 ; v4(3,3.6) 1.52,2.12 ; v2(22.7,36) 23.11,36.41 ; v2(22.7,36) 23.11,35.59 ; v2(22.7,36) 22.3,36.41 ; v2(22.7,36) 22.3,35.59 ; v1(26,1.2) 26.46,0.74 ; v1(26,1.2) 25.54,1.66 ; v1(26,1.2) 26.46,1.66 ; v1(26,1.2) 25.54,0.74 ; v2(27.1,45.8) 27.5,46.2 ; v2(27.1,45.8) 27.5,45.4 ; v2(27.1,45.8) 26.7,46.2 ; v2(27.1,45.8) 26.7,45.4 ; v2(7.09,14.38) 7.5,13.97 ; v2(7.09,14.38) 7.5,14.78 ; v2(7.09,14.38) 6.69,14.78 ; v2(7.09,14.38) 6.69,13.97 ; 7.99,17.38 v2(8.39,16.98) ; v2(8.39,16.98) 8.79,17.38 ; v2(8.39,16.98) 8.79,16.57 ; v2(8.39,16.98) 7.99,16.57 ; 29.58,40.02 v1(30.04,40.48) ; v1(30.04,40.48) 30.5,40.02 ; v1(30.04,40.48) 29.58,40.93 ; v1(30.04,40.48) 30.5,40.93 ; 11.79,17.87 v2(12.19,18.28) ; v2(12.19,18.28) 12.59,17.87 ; v2(12.19,18.28) 11.79,18.68 ; v2(12.19,18.28) 12.59,18.68 ; 11.84,12.28 v2(12.24,11.88) ; v2(12.24,11.88) 12.64,11.47 ; v2(12.24,11.88) 12.64,12.28 ; v2(12.24,11.88) 11.84,11.47 ; v1(84.8,84.4) 85.26,83.94 ; v1(84.8,84.4) 85.26,84.86 ; v1(84.8,84.4) 84.34,83.94 ; v1(84.8,84.4) 84.34,84.86 ; 18.7,57.7 v2(19.1,57.3) ; v2(19.1,57.3) 19.51,57.7 ; v2(19.1,57.3) 18.7,56.9 ; v2(19.1,57.3) 19.51,56.9 ; 43.18,39.03 v1(43.64,38.58) ; v1(43.64,38.58) 44.1,38.12 ; v1(43.64,38.58) 44.1,39.03 ; v1(43.64,38.58) 43.18,38.12 ; v2(67.64,6.97) 68.05,6.57 ; v2(67.64,6.97) 68.05,7.38 ; v2(67.64,6.97) 67.23,7.38 ; v2(67.64,6.97) 67.23,6.57 ; 7.99,52.88 v2(8.39,52.48) ; v2(8.39,52.48) 8.79,52.07 ; v2(8.39,52.48) 8.79,52.88 ; v2(8.39,52.48) 7.99,52.07 ; v1(84.8,52.4) 85.26,52.86 ; v1(84.8,52.4) 84.34,52.86 ; v1(84.8,52.4) 84.34,51.94 ; v1(84.8,52.4) 85.26,51.94 ; 65.25,1.18 v2(64.84,0.77) 64.44,1.18 ; v3(55.36,48.3) 56.07,49 ; v3(55.36,48.3) 54.66,47.59 ; v3(55.36,48.3) 56.07,47.59 ; v3(55.36,48.3) 54.66,49 ; v2(66.6,78) 67,78.41 ; v2(66.6,78) 67,77.59 ; v2(66.6,78) 66.19,77.59 ; v2(66.6,78) 66.19,78.41 ; v1(75.8,88.8) 76.26,88.34 ; v1(75.8,88.8) 75.34,88.34 ; v1(75.8,88.8) 76.26,89.26 ; v1(75.8,88.8) 75.34,89.26 ; v1(20.64,71.97) 21.1,71.52 ; v1(20.64,71.97) 20.18,72.43 ; v1(20.64,71.97) 21.1,72.43 ; v1(20.64,71.97) 20.18,71.52 ; v1(40.6,38.6) 41.06,38.14 ; v1(40.6,38.6) 40.14,39.06 ; v1(40.6,38.6) 40.14,38.14 ; v1(40.6,38.6) 41.06,39.06 ; 11.84,56.68 v2(12.24,56.27) ; v2(12.24,56.27) 12.64,55.87 ; v2(12.24,56.27) 12.64,56.68 ; v2(12.24,56.27) 11.84,55.87 ; 25.34,88.34 v1(25.8,88.8) ; v1(25.8,88.8) 25.34,89.26 ; v1(25.8,88.8) 26.26,89.26 ; v1(25.8,88.8) 26.26,88.34 ; 0.74,36.86 v1(1.2,36.4) ; v1(1.2,36.4) 1.66,35.94 ; v1(1.2,36.4) 1.66,36.86 ; v1(1.2,36.4) 0.74,35.94 ; v1(35.26,67.27) 35.72,67.73 ; v1(35.26,67.27) 34.8,67.73 ; v1(35.26,67.27) 34.8,66.82 ; v1(35.26,67.27) 35.72,66.82 ; v1(69.8,88.8) 70.26,89.26 ; v1(69.8,88.8) 69.34,88.34 ; v1(69.8,88.8) 69.34,89.26 ; v1(69.8,88.8) 70.26,88.34 ; v1(31.34,70.25) 31.8,69.8 ; v1(31.34,70.25) 31.8,70.71 ; v1(31.34,70.25) 30.88,69.8 ; v1(31.34,70.25) 30.88,70.71 ; v2(67.34,45.98) 67.75,45.57 ; v2(67.34,45.98) 67.75,46.38 ; v2(67.34,45.98) 66.94,46.38 ; v2(67.34,45.98) 66.94,45.57 ; v2(13.49,15.67) 13.89,16.08 ; v2(13.49,15.67) 13.89,15.27 ; v2(13.49,15.67) 13.09,16.08 ; v2(13.49,15.67) 13.09,15.27 ; 45.3,6.7 v2(45.7,7.1) ; v2(45.7,7.1) 46.1,6.7 ; v2(45.7,7.1) 45.3,7.5 ; v2(45.7,7.1) 46.1,7.5 ; v2(58.4,52.2) 58.8,51.8 ; v2(58.4,52.2) 57.99,52.61 ; v2(58.4,52.2) 57.99,51.8 ; v2(58.4,52.2) 58.8,52.61 ; v3(55.36,3.09) 56.07,2.38 ; v3(55.36,3.09) 56.07,3.79 ; v3(55.36,3.09) 54.66,2.38 ; v3(55.36,3.09) 54.66,3.79 ; 0.74,20.86 v1(1.2,20.4) ; v1(1.2,20.4) 0.74,19.94 ; v1(1.2,20.4) 1.66,20.86 ; v1(1.2,20.4) 1.66,19.94 ; v2(12.19,48.68) 12.59,48.27 ; v2(12.19,48.68) 12.59,49.08 ; v2(12.19,48.68) 11.79,49.08 ; v2(12.19,48.68) 11.79,48.27 ; v1(84.8,36.4) 85.26,36.86 ; v1(84.8,36.4) 84.34,36.86 ; v1(84.8,36.4) 85.26,35.94 ; v1(84.8,36.4) 84.34,35.94 ; v1(47.74,38.58) 48.2,39.03 ; v1(47.74,38.58) 48.2,38.12 ; v1(47.74,38.58) 47.28,38.12 ; v1(47.74,38.58) 47.28,39.03 ; v2(8.39,20.78) 8.79,20.37 ; v2(8.39,20.78) 8.79,21.18 ; v2(8.39,20.78) 7.99,21.18 ; v2(8.39,20.78) 7.99,20.37 ; 69.13,1.18 v2(69.54,0.77) 69.94,1.18 ; v1(58.7,32.1) 59.16,31.64 ; v1(58.7,32.1) 59.16,32.56 ; v1(58.7,32.1) 58.24,32.56 ; v1(58.7,32.1) 58.24,31.64 ; 6.69,54.18 v2(7.09,53.77) ; v2(7.09,53.77) 6.69,53.37 ; v2(7.09,53.77) 7.5,54.18 ; v2(7.09,53.77) 7.5,53.37 ; v1(84.8,20.4) 85.26,20.86 ; v1(84.8,20.4) 84.34,19.94 ; v1(84.8,20.4) 84.34,20.86 ; v1(84.8,20.4) 85.26,19.94 ; v2(35.5,14.3) 35.91,13.89 ; v2(35.5,14.3) 35.09,13.89 ; v2(35.5,14.3) 35.09,14.71 ; v2(35.5,14.3) 35.91,14.71 ; 6.69,58.47 v2(7.09,58.88) ; v2(7.09,58.88) 6.69,59.28 ; v2(7.09,58.88) 7.5,58.47 ; v2(7.09,58.88) 7.5,59.28 ; 9.44,89.26 v1(9.9,88.8) ; v1(9.9,88.8) 9.44,88.34 ; v1(9.9,88.8) 10.36,88.34 ; v1(9.9,88.8) 10.36,89.26 ; v1(49.8,88.8) 50.26,88.34 ; v1(49.8,88.8) 50.26,89.26 ; v1(49.8,88.8) 49.34,88.34 ; v1(49.8,88.8) 49.34,89.26 ; v4(83,3.6) 84.48,2.12 ; v4(83,3.6) 81.52,2.12 ; v4(83,3.6) 81.52,5.08 ; v4(83,3.6) 84.48,5.08 ; 6.7,50.3 v2(7.1,49.9) ; v2(7.1,49.9) 6.7,49.5 ; v2(7.1,49.9) 7.5,50.3 ; v2(7.1,49.9) 7.5,49.5 ; v1(41.56,74.27) 42.02,74.73 ; v1(41.56,74.27) 42.02,73.82 ; v1(41.56,74.27) 41.1,73.82 ; v1(41.56,74.27) 41.1,74.73 ; 49.58,39.53 v1(50.04,39.08) ; v1(50.04,39.08) 50.5,38.62 ; v1(50.04,39.08) 49.58,38.62 ; v1(50.04,39.08) 50.5,39.53 ; v1(14,1.2) 14.46,0.74 ; v1(14,1.2) 13.54,0.74 ; v1(14,1.2) 13.54,1.66 ; v1(14,1.2) 14.46,1.66 ; 65.44,45.57 v2(65.84,45.98) ; v2(65.84,45.98) 66.25,46.38 ; v2(65.84,45.98) 65.44,46.38 ; v2(65.84,45.98) 66.25,45.57 ; 0.74,32.86 v1(1.2,32.4) ; v1(1.2,32.4) 0.74,31.94 ; v1(1.2,32.4) 1.66,32.86 ; v1(1.2,32.4) 1.66,31.94 ; 6.69,56.68 v2(7.09,56.27) ; v2(7.09,56.27) 7.5,55.87 ; v2(7.09,56.27) 7.5,56.68 ; v2(7.09,56.27) 6.69,55.87 ; v1(40.6,36.6) 41.06,37.06 ; v1(40.6,36.6) 40.14,36.14 ; v1(40.6,36.6) 41.06,36.14 ; v1(40.6,36.6) 40.14,37.06 ; 53.34,88.34 v1(53.8,88.8) ; v1(53.8,88.8) 54.26,89.26 ; v1(53.8,88.8) 53.34,89.26 ; v1(53.8,88.8) 54.26,88.34 ; v2(5.84,41.08) 6.25,40.67 ; v2(5.84,41.08) 6.25,41.48 ; v2(5.84,41.08) 5.44,41.48 ; v2(5.84,41.08) 5.44,40.67 ; v2(10.74,30.28) 11.14,30.68 ; v2(10.74,30.28) 10.34,29.87 ; v2(10.74,30.28) 10.34,30.68 ; v2(10.74,30.28) 11.14,29.87 ; 21.54,1.66 v1(22,1.2) ; v1(22,1.2) 22.46,0.74 ; v1(22,1.2) 21.54,0.74 ; v1(22,1.2) 22.46,1.66 ; v1(37.8,88.8) 38.26,88.34 ; v1(37.8,88.8) 37.34,88.34 ; v1(37.8,88.8) 37.34,89.26 ; v1(37.8,88.8) 38.26,89.26 ; 41.54,1.66 v1(42,1.2) ; v1(42,1.2) 42.46,1.66 ; v1(42,1.2) 41.54,0.74 ; v1(42,1.2) 42.46,0.74 ; v3(73.84,3.09) 74.54,3.79 ; v3(73.84,3.09) 74.54,2.38 ; v3(73.84,3.09) 73.13,2.38 ; v3(73.84,3.09) 73.13,3.79 ; 5.34,89.26 v1(5.8,88.8) ; v1(5.8,88.8) 6.26,89.26 ; v1(5.8,88.8) 5.34,88.34 ; v1(5.8,88.8) 6.26,88.34 ; 60.15,1.18 v2(59.74,0.77) 59.34,1.18 ; 59.44,46.38 v2(59.84,45.98) ; v2(59.84,45.98) 60.24,46.38 ; v2(59.84,45.98) 60.24,45.57 ; v2(59.84,45.98) 59.44,45.57 ; 0.74,75.94 v1(1.2,76.4) ; v1(1.2,76.4) 1.66,76.86 ; v1(1.2,76.4) 0.74,76.86 ; v1(1.2,76.4) 1.66,75.94 ; 16.39,7.21 v2(16.8,6.8) ; v2(16.8,6.8) 17.2,7.21 ; v2(16.8,6.8) 17.2,6.39 ; v2(16.8,6.8) 16.39,6.39 ; 67.03,1.18 v2(67.44,0.77) 67.84,1.18 ; 69.44,45.57 v2(69.84,45.98) ; v2(69.84,45.98) 70.25,45.57 ; v2(69.84,45.98) 69.44,46.38 ; v2(69.84,45.98) 70.25,46.38 ; v2(62.34,54.68) 62.74,54.27 ; v2(62.34,54.68) 62.74,55.08 ; v2(62.34,54.68) 61.94,55.08 ; v2(62.34,54.68) 61.94,54.27 ; v2(34.5,78.8) 34.91,78.39 ; v2(34.5,78.8) 34.09,79.2 ; v2(34.5,78.8) 34.91,79.2 ; v2(34.5,78.8) 34.09,78.39 ; 84.34,55.94 v1(84.8,56.4) ; v1(84.8,56.4) 85.26,56.86 ; v1(84.8,56.4) 85.26,55.94 ; v1(84.8,56.4) 84.34,56.86 ; v1(1.2,80.4) 1.66,79.94 ; v1(1.2,80.4) 0.74,80.86 ; v1(1.2,80.4) 1.66,80.86 ; v1(1.2,80.4) 0.74,79.94 ; v1(43.56,74.27) 44.02,73.82 ; v1(43.56,74.27) 43.1,73.82 ; v1(43.56,74.27) 44.02,74.73 ; v1(43.56,74.27) 43.1,74.73 ; 20.99,13.11 v2(21.4,12.7) ; v2(21.4,12.7) 21.8,13.11 ; v2(21.4,12.7) 20.99,12.29 ; v2(21.4,12.7) 21.8,12.29 ; 19.8,84.7 v2(20.2,84.3) ; v2(20.2,84.3) 20.61,83.89 ; v2(20.2,84.3) 19.8,83.89 ; v2(20.2,84.3) 20.61,84.7 ; 57.14,31.56 v1(57.6,31.1) ; v1(57.6,31.1) 58.06,31.56 ; v1(57.6,31.1) 58.06,30.64 ; v1(57.6,31.1) 57.14,30.64 ; 10.39,45.2 v2(10.8,44.8) ; v2(10.8,44.8) 11.21,44.4 ; v2(10.8,44.8) 11.21,45.2 ; v2(10.8,44.8) 10.39,44.4 ; v1(65.8,88.8) 66.26,88.34 ; v1(65.8,88.8) 65.34,88.34 ; v1(65.8,88.8) 65.34,89.26 ; v1(65.8,88.8) 66.26,89.26 ; 1.52,88.48 v4(3,87) ; v4(3,87) 4.48,85.52 ; v4(3,87) 4.48,88.48 ; v4(3,87) 1.52,85.52 ; v2(56.64,1.48) 57.05,1.07 ; v2(56.64,1.48) 57.05,1.88 ; v2(56.64,1.48) 56.23,1.07 ; v2(56.64,1.48) 56.23,1.88 ; v2(12.24,30.98) 12.64,30.57 ; v2(12.24,30.98) 12.64,31.38 ; v2(12.24,30.98) 11.84,30.57 ; v2(12.24,30.98) 11.84,31.38 ; v2(58.2,48.5) 58.6,48.09 ; v2(58.2,48.5) 57.8,48.09 ; v2(58.2,48.5) 57.8,48.91 ; v2(58.2,48.5) 58.6,48.91 ; v1(57.8,88.8) 58.26,89.26 ; v1(57.8,88.8) 57.34,88.34 ; v1(57.8,88.8) 57.34,89.26 ; v1(57.8,88.8) 58.26,88.34
  BOTTOM w0.25: v2(69.54,0.77) 69.85,1.08 M1_51.1 ; C22.2 8.65,57.84 v2(8.39,57.58) ; M2_22.1 62.35,54.66 v2(62.34,54.68) ; v2(70.24,6.97) 69.85,7.37 M1_52.1 ; C23.2 6.83,58.61 v2(7.09,58.88) ; M2_41.1 67.35,45.98 v2(67.34,45.98) ; v2(8.39,10.68) 8.55,10.51 C24.2 ; C21.2 8.55,55.24 v2(8.39,55.08) ; v2(64.64,6.97) 64.85,7.19 M1_32.1 ; M2_21.1 62.35,45.98 v2(62.34,45.98) ; v2(67.44,0.77) 67.35,0.87 M1_41.1 ; v2(64.84,45.98) 64.85,45.98 M2_31.1 ; v2(62.24,0.77) 62.35,0.89 M1_21.1 ; C19.2 12.03,58.71 v2(12.19,58.88) ; v2(64.84,54.68) 64.85,54.66 M2_32.1 ; v2(61.34,0.77) 61.35,0.79 M1_17.1 ; M2_52.1 69.84,54.67 v2(69.8,54.7) ; C18.2 13.75,57.84 v2(13.49,57.58) ; v2(62.44,6.97) 62.35,7.06 M1_22.1 ; M2_11.1 59.85,45.98 v2(59.84,45.98) ; v2(59.74,0.77) 59.85,0.89 M1_11.1 ; v2(67.64,52.18) 67.35,52.47 M2_42.1 ; v2(8.39,52.48) 8.55,52.64 C20.2 ; v2(69.84,45.98) 69.85,45.98 M2_51.1 ; v2(67.64,6.97) 67.35,7.27 M1_42.1 ; M2_35.1 65.85,45.98 v2(65.84,45.98) ; v2(59.84,54.68) 59.85,54.66 M2_12.1 ; M1_12.1 59.85,9.17 v2(59.54,9.47) ; v2(64.84,0.77) 64.84,0.78 M1_31.1
